# Altium PCB USB_BITES.PcbDoc (part 1 of 2)
Units mm, origin at the board's own origin, x right, y up, seen from the top; angles counter-clockwise.
Board outline 51.5 x 42 mm, 4 copper layers (Top Layer, Layer 1, Layer 2, Bottom Layer), stack 0.603 mm thick; 64 components, 43 nets, 223 pads, 119 vias.
Unrouted connection lines stored in the file: 6.
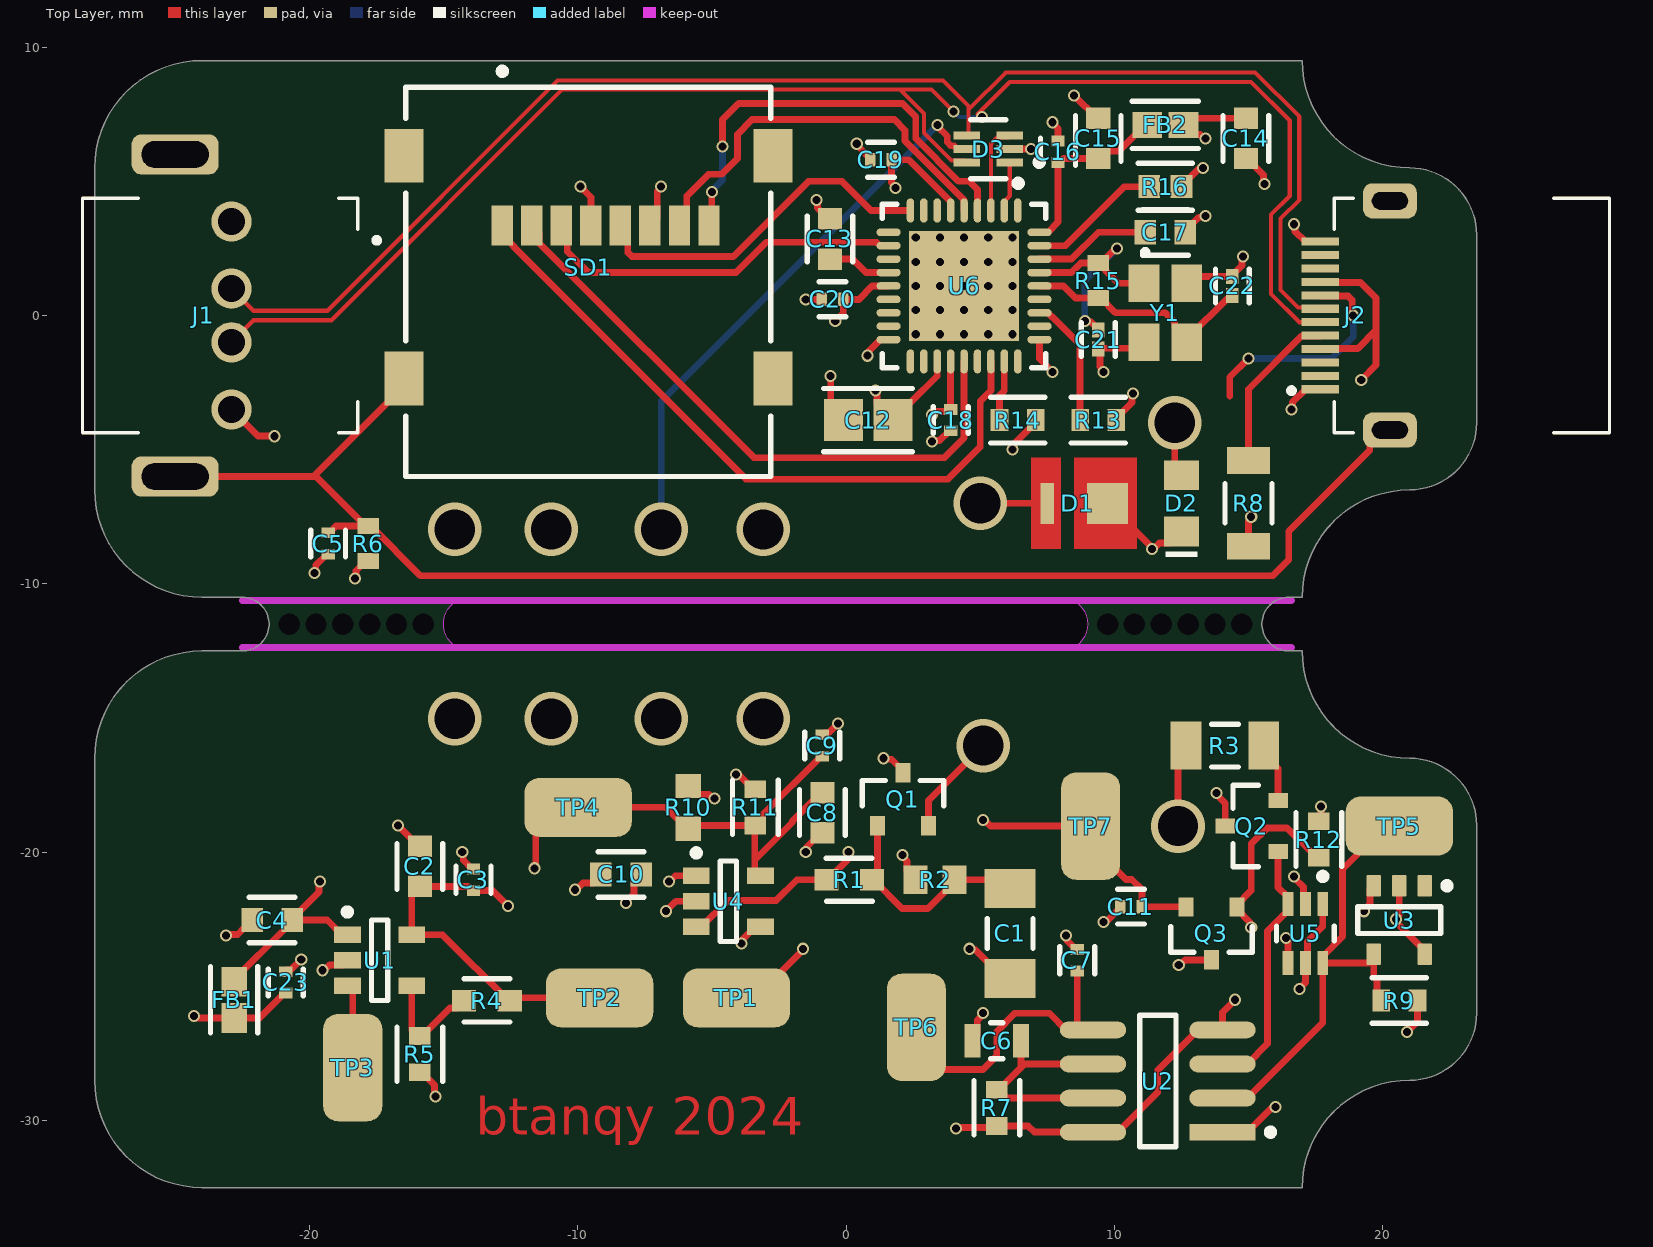
[diagram p0: Top Layer view]
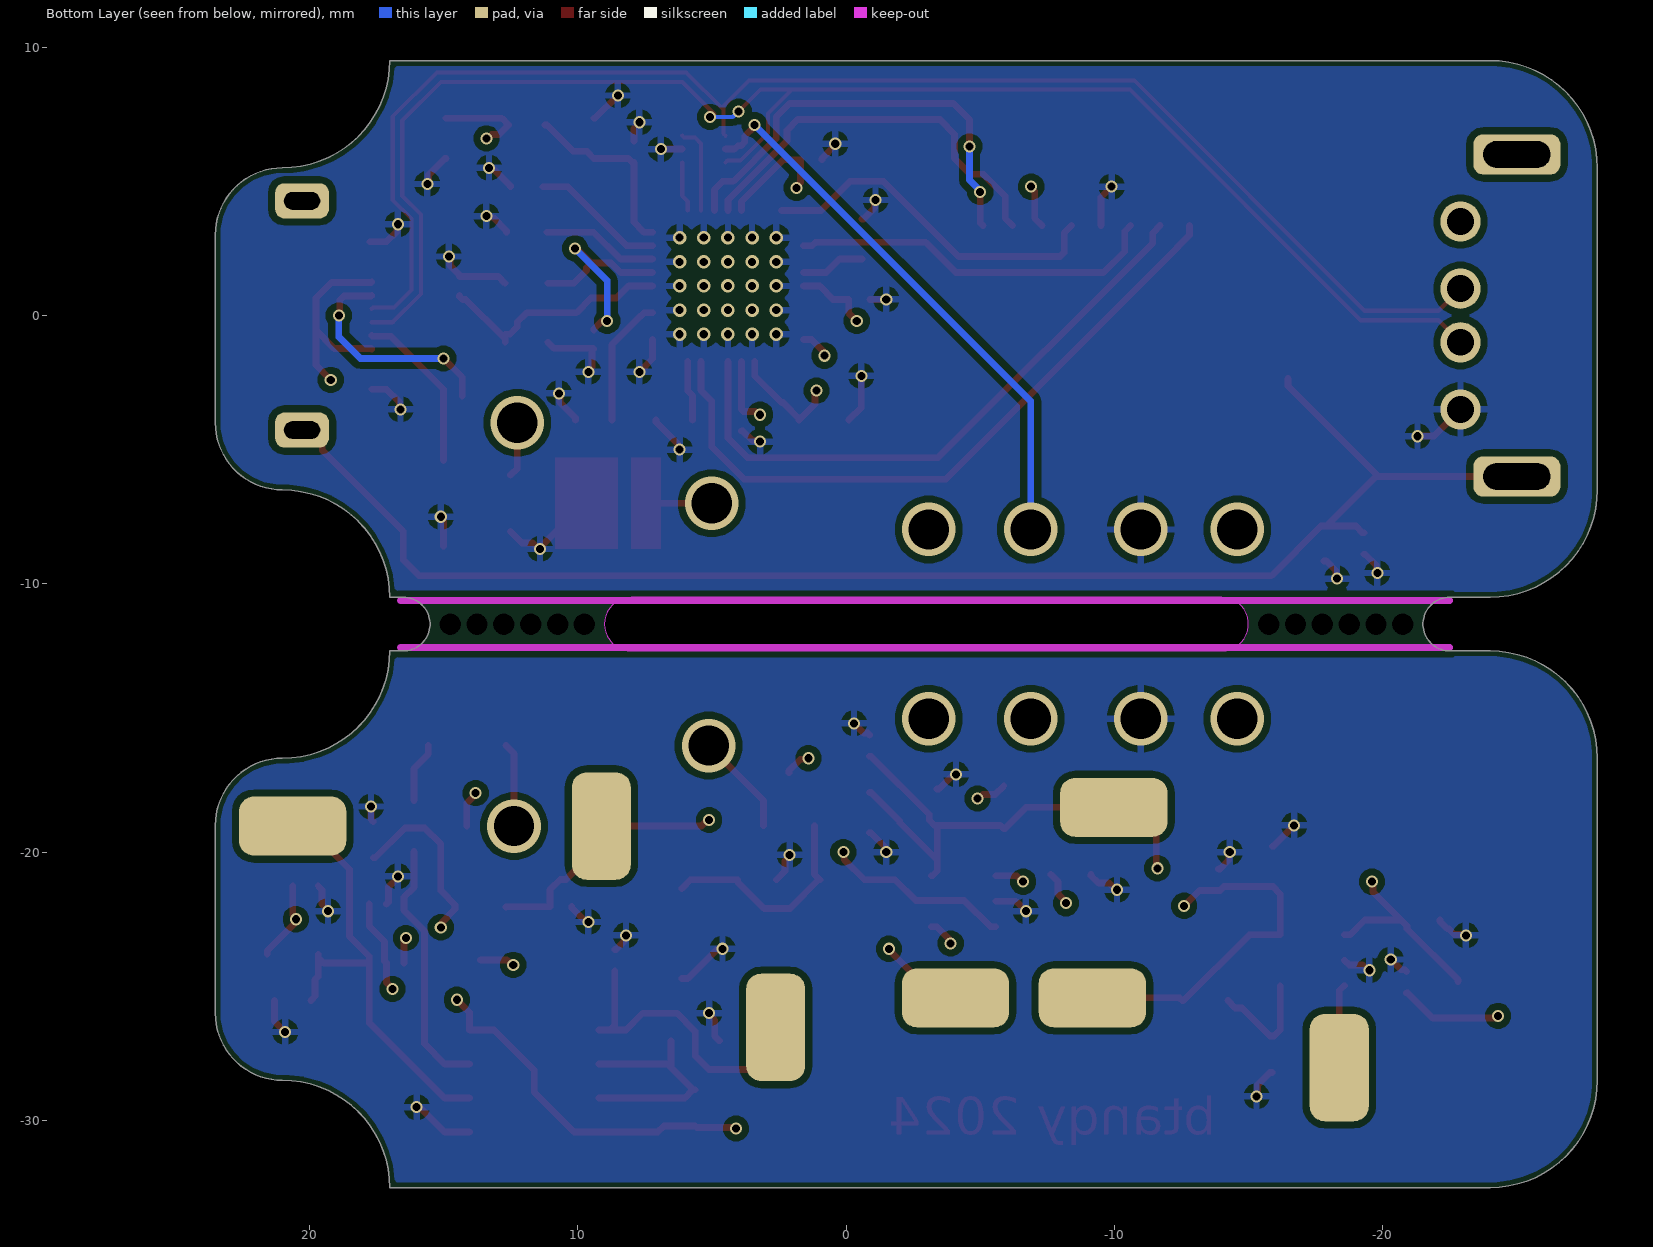
[diagram p1: Bottom Layer view, seen from below]
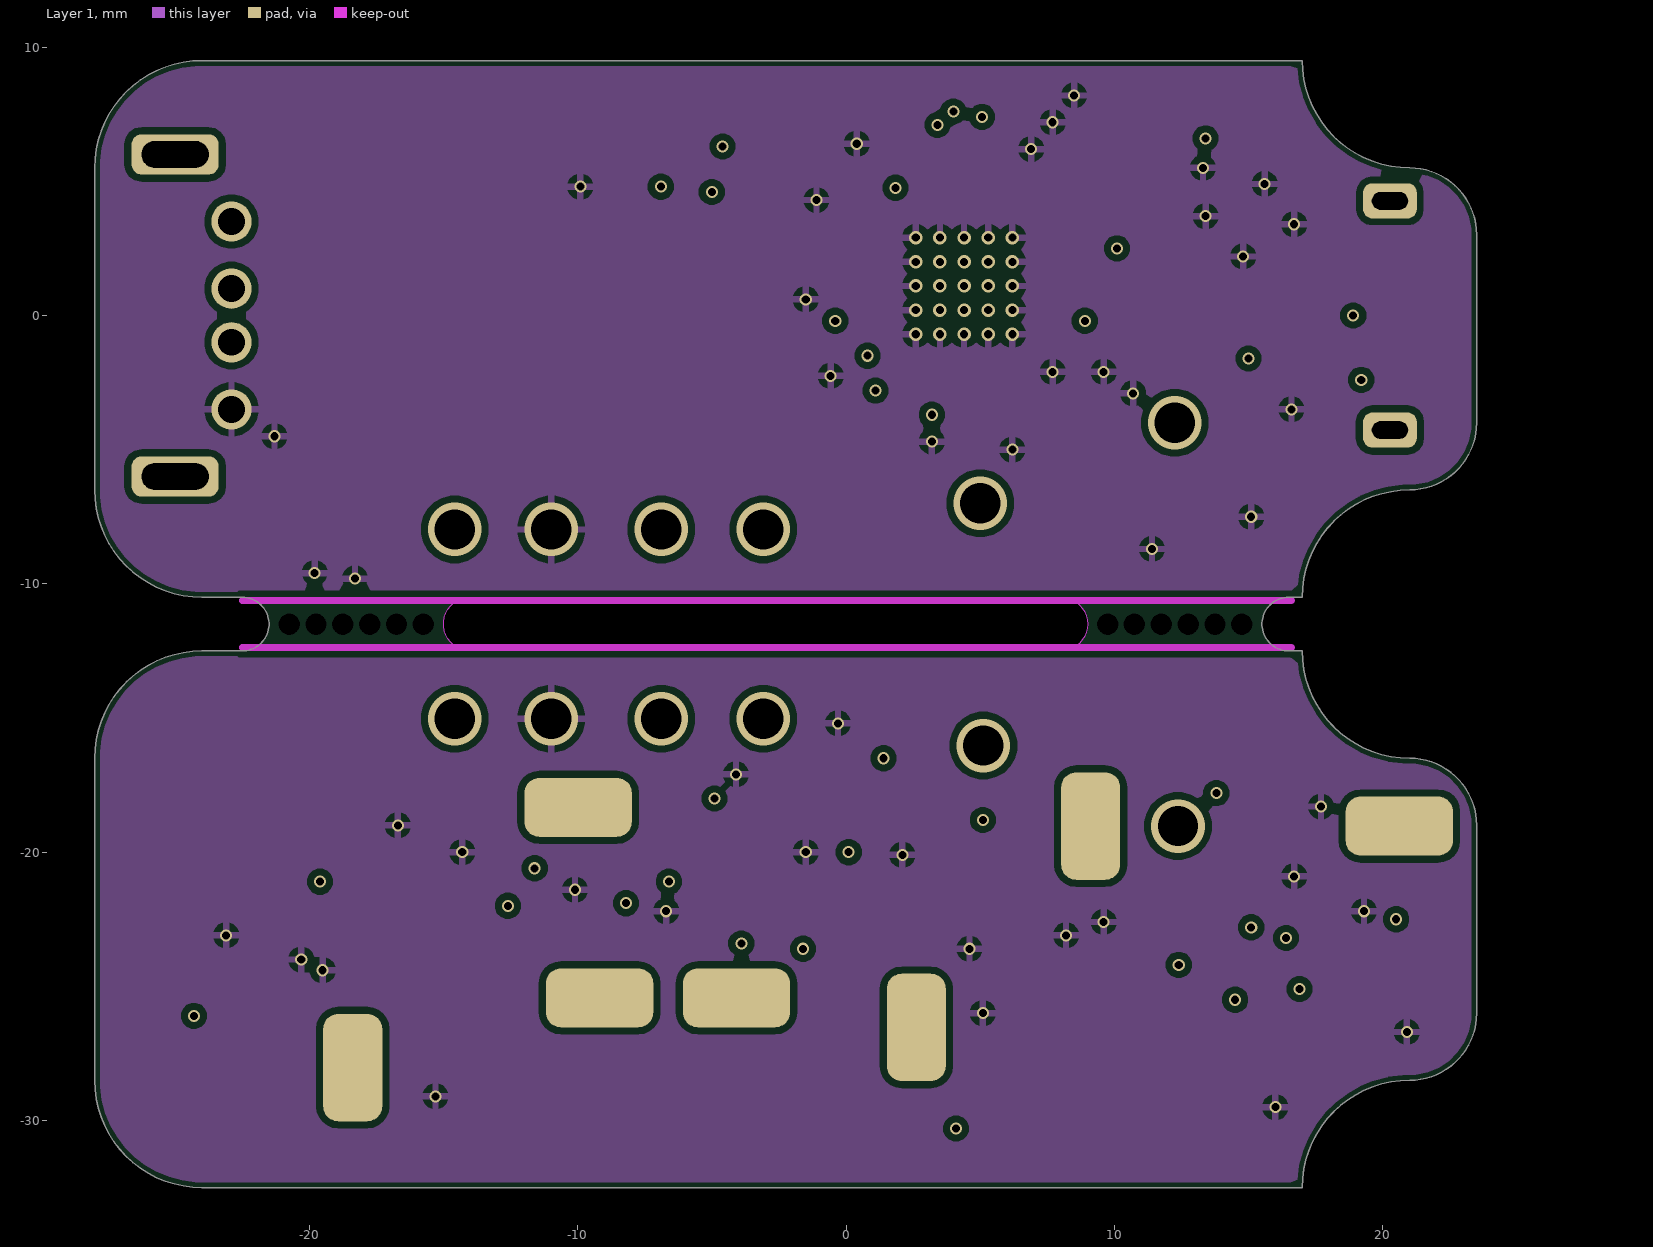
[diagram p2: Layer 1]
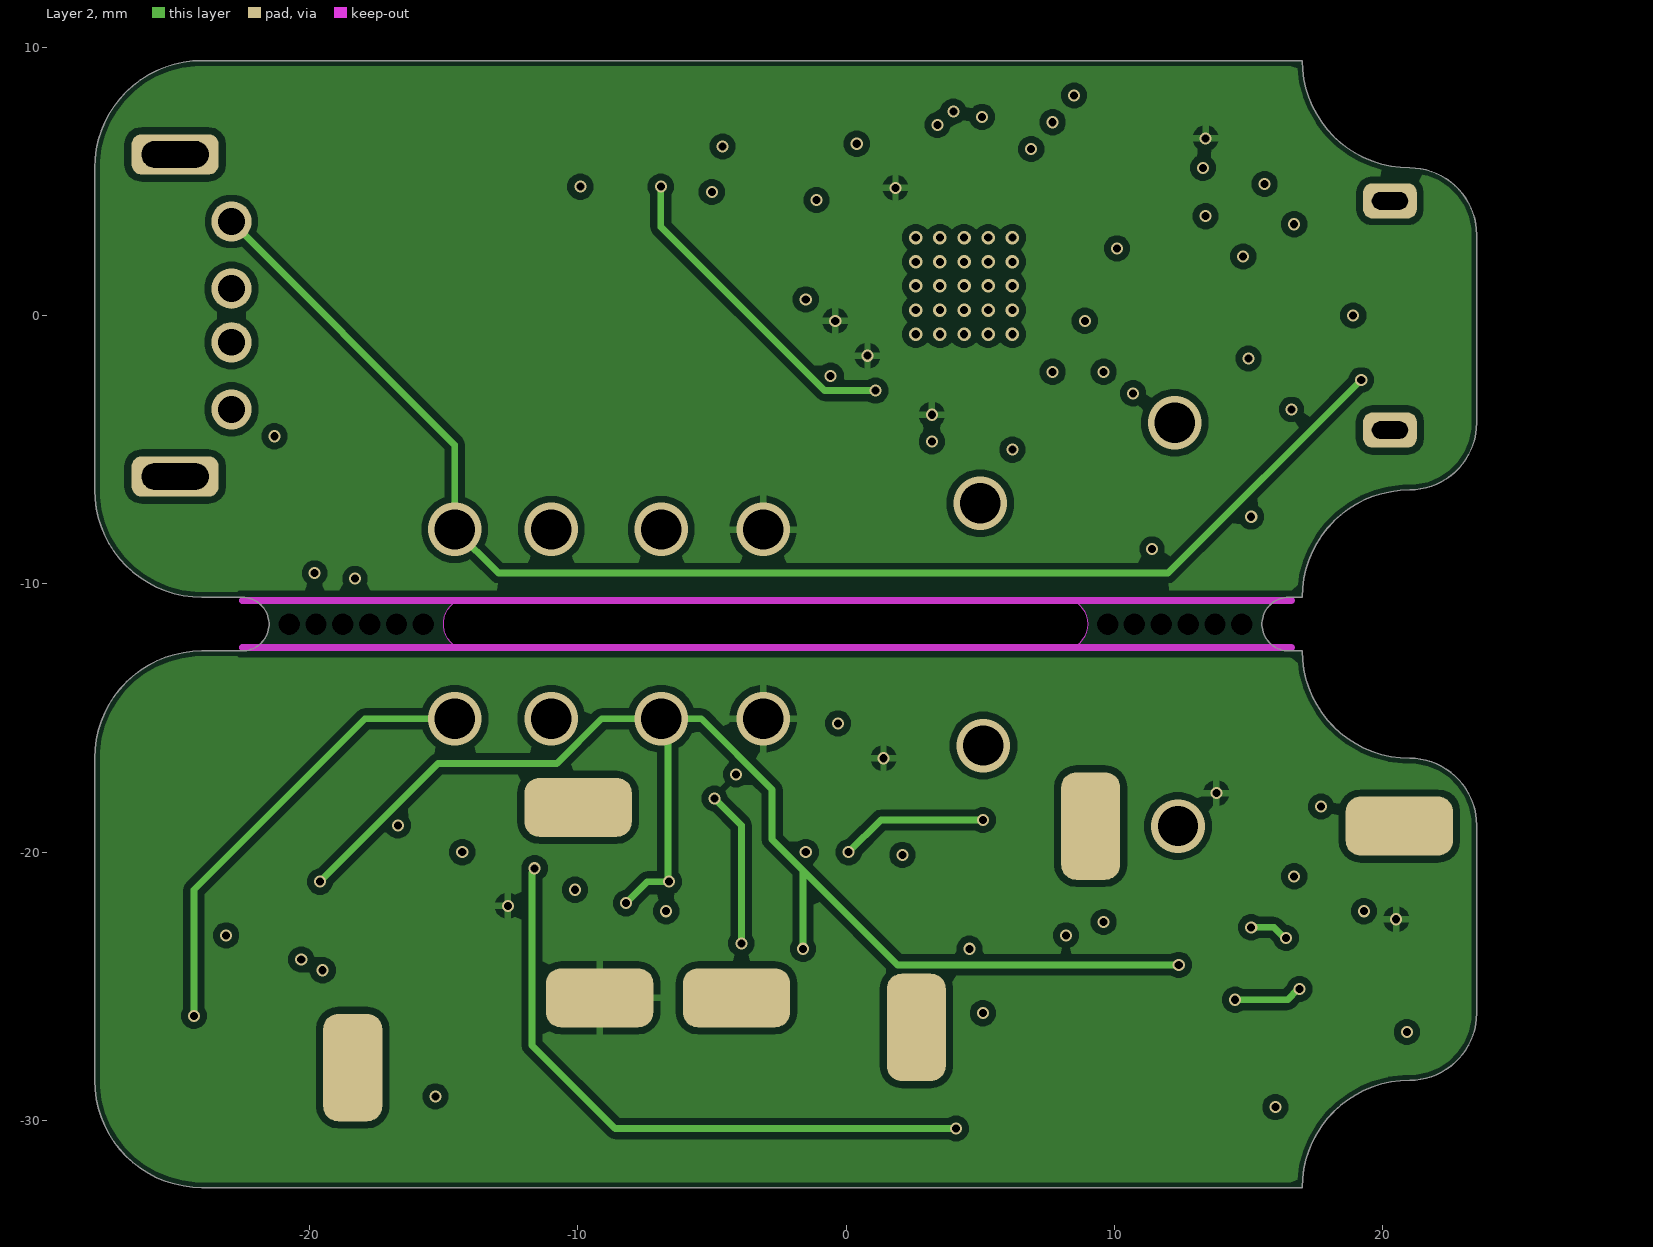
[diagram p3: Layer 2]
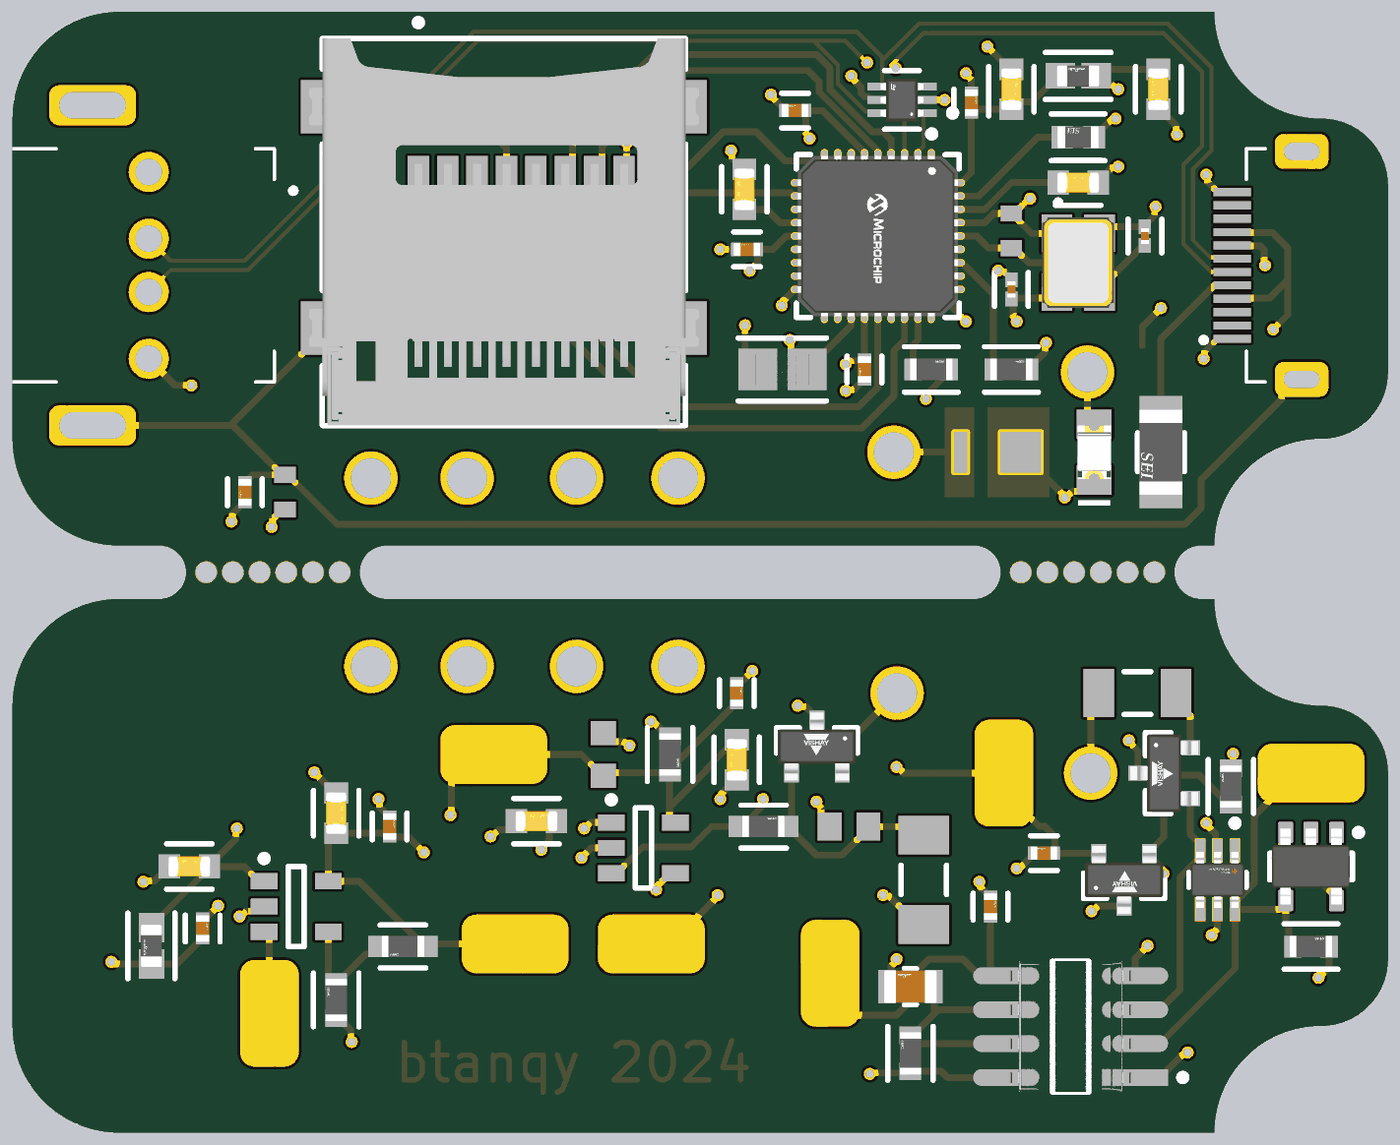
[diagram p4: 3D render of the assembled board from above, using the file's embedded part models]

## Layer stack, top to bottom
Top Solder: solder mask 0.0102, Solder Resist, Dk 3.5
Top Layer: signal copper 0.0356
Dielectric 2: prepreg 0.0711, PP-006, Dk 4.1
Layer 1: signal copper 0.035
Dielectric 1: dielectric 0.32, FR-4, Dk 4.8
Layer 2: signal copper 0.035
Dielectric 3: prepreg 0.0711, PP-006, Dk 4.1
Bottom Layer: signal copper 0.0356
Bottom Solder: solder mask 0.0102, Solder Resist, Dk 3.5

## Board outline
-24,-32.5 cw(c-24,-28.5) -28,-28.5 -28,-16.5 cw(c-24,-16.5) -24,-12.5 -22.5,-12.5 ccw(c-22.5,-11.5) -22.5,-10.5 -24,-10.5 cw(c-24,-6.5) -28,-6.5 -28,5.5 cw(c-24,5.5) -24,9.5 17,9.5 ccw(c21,9.5) 21,5.5 cw(c21,3) 23.5,3 23.5,-4 cw(c21,-4) 21,-6.5 ccw(c21,-10.5) 17,-10.5 16.5,-10.5 ccw(c16.5,-11.5) 16.5,-12.5 17,-12.5 ccw(c21,-12.5) 21,-16.5 cw(c21,-19) 23.5,-19 23.5,-26 cw(c21,-26) 21,-28.5 ccw(c21,-32.5) 17,-32.5
cut-out: -14,-12.5 cw(c-14,-11.5) -14,-10.5 8,-10.5 cw(c8,-11.5) 9,-11.5 cw(c8,-11.5) 8,-12.5

## Design rules (kind name [scope] priority, off if disabled: settings)
BoardOutlineClearance [All] p1: gap=0.254 ignorepadtopadclearanceinfootprint=FALSE except(0: Arc-SplitContinuation Track-SplitContinuation SMDPad-SplitContinuation THPad-SplitContinuation Via-SplitContinuation Fill-SplitContinuation Poly-SplitContinuation Region-SplitContinuation Text-SplitContinuation; 0.2: Arc-OutlineEdge Track-OutlineEdge SMDPad-OutlineEdge THPad-OutlineEdge Via-OutlineEdge Fill-OutlineEdge Poly-OutlineEdge Region-OutlineEdge Text-OutlineEdge)
Clearance [All] p1: gap=0.254 ignorepadtopadclearanceinfootprint=FALSE except(0: SMDPad-Via; 0.1: Arc-Arc Arc-Track Arc-SMDPad Arc-THPad Track-Track Track-SMDPad Track-THPad; 0.15: SMDPad-SMDPad; 0.2: Arc-Via Track-Via THPad-THPad Via-Via)
ComponentClearance [All] p1: gap=0.1 collisioncheckmode=3 verticalgap=0.254 showdistances=FALSE
DiffPairsRouting [All] p1: maxlimit=0.254 minlimit=0.18 mostfreqgap=0.254 toplayer_maxgap=0.22 toplayer_prefgap=0.2 toplayer_minwidth=0.1 toplayer_maxwidth=0.2 toplayer_prefwidth=0.155 midlayer1_mingap=0.254 midlayer1_minwidth=0.381 midlayer1_maxwidth=0.381 midlayer1_prefwidth=0.381 midlayer2_mingap=0.254 midlayer2_minwidth=0.381 midlayer2_maxwidth=0.381 midlayer2_prefwidth=0.381 bottomlayer_mingap=0.254 bottomlayer_minwidth=0.381 bottomlayer_maxwidth=0.381 bottomlayer_prefwidth=0.381 maxuncoupledlength=12.7
MinimumSolderMaskSliver [All] p1: minsoldermaskwidth=0.1
PolygonConnect [All] p1: connectstyle=Relief reliefconductorwidth=0.254 reliefentries=4 polygonreliefangle="90 Angle" airgapwidth=0.254
RoutingVias [All] p1: holewidth=0.3 width=0.45 viastyle="Through Hole" minholewidth=0.3 minwidth=0.45 maxholewidth=10 maxwidth=10
SilkToSilkClearance [All] p1: silktosilkclearance=0.15
SolderMaskExpansion [All] p1: expansion=0.102 istentingtop=FALSE
SupplyNets "Schematic Supply Nets_4" [InNet('AVCC')] p1: voltage=0.000
SupplyNets "Schematic Supply Nets_3" [InNet('4.5V')] p2: voltage=0.000
SupplyNets "Schematic Supply Nets_2" [InNet('3V3')] p3: voltage=0.000
SupplyNets "Schematic Supply Nets_1" [InNet('VCC')] p4: voltage=0.000
SupplyNets "Schematic Supply Nets" [InNet('GND')] p5: voltage=0.000
Width [All] p1: maxlimit=10 minlimit=0.1 preferedwidth=0.254 midlayer1_minwidth=0.254 midlayer1_maxwidth=0.254 midlayer2_minwidth=0.254 midlayer2_maxwidth=0.254 minimp=50.000000 maximp=50.000000 favimp=50.000000
26 further rules are at their usual default settings.

## Classes and differential pairs
component class U_MSC: C13 C14 C15 C16 C17 C18 C19 C20 C21 C22 FB2 R15 R16 U6 Y1
component class Master: C2 C3 C4 C5 C6 C7 C8 C9 C10 C11 C12 C23 D3 FB1 J1 J2 Q3 R4 R5 R6 R7 R8 R9 R10 R11 R12 R13 R14 SD1 TP1 TP2 TP3 TP4 TP5 TP6 TP7 U1 U2 U3 U4 U5
component class Designator: C1 D1 D2 Q1 Q2 R1 R2 R3
differential pair D_IN: +D_IN_P -D_IN_N
differential pair D: +D_P -D_N

## Components (designator, comment, footprint, x,y, rotation, side; value= is the part's Value field where it differs from the comment)
C1 "GRM31CR60J107KEA8L" CAPC3216X19N 6.119,-23.028 r90 top value=100uF
C2 "CC0603KRX7R7BB105" FP-CC0603-DA-MFG -15.881,-20.528 r90 top value="1 uF"
C3 "GRM155R71C104KA88J" FP-GRM155-0_05-MFG -13.881,-21.028 r90 top
C4 "CC0603KRX7R7BB105" FP-CC0603-DA-MFG -21.381,-22.528 r180 top value="1 uF"
C5 "GRM155R71C104KA88J" FP-GRM155-0_05-MFG -19.3,-8.5 r270 top
C6 "GRM21BR61C106KE15K" FP-GRM21B-0_1-MFG 5.619,-27.028 r180 top
C7 "GRM155R71C104KA88J" FP-GRM155-0_05-MFG 8.619,-24.028 r90 top
C8 "CC0603KRX7R7BB105" FP-CC0603-DA-MFG -0.881,-18.528 r270 top value="1 uF"
C9 "GRM155R71C104KA88J" FP-GRM155-0_05-MFG -0.881,-16.028 r90 top
C10 "CC0603KRX7R7BB105" FP-CC0603-DA-MFG -8.381,-20.828 r180 top value="1 uF"
C11 "GRM155R71C104KA88J" FP-GRM155-0_05-MFG 10.619,-22.028 r180 top
C12 "CL21A475KAQNNNE" FP-CL21-IPC_A 0.826,-3.9 r180 top
C13 "CC0603KRX7R7BB105" FP-CC0603-DA-MFG -0.6,2.85 r270 top value="1 uF"
C14 "CC0603KRX7R7BB105" FP-CC0603-DA-MFG 14.9,6.6 r270 top value="1 uF"
C15 "CC0603KRX7R7BB105" FP-CC0603-DA-MFG 9.4,6.6 r90 top value="1 uF"
C16 "GRM155R71C104KA88J" FP-GRM155-0_05-MFG 7.9,6.1 r90 top
C17 "CC0603KRX7R7BB105" FP-CC0603-DA-MFG 11.9,3.1 r180 top value="1 uF"
C18 "GRM155R71C104KA88J" FP-GRM155-0_05-MFG 3.9,-3.9 r270 top
C19 "GRM155R71C104KA88J" FP-GRM155-0_05-MFG 1.3,5.8 r180 top
C20 "GRM155R71C104KA88J" FP-GRM155-0_05-MFG -0.5,0.6 r180 top
C21 "GJM0335C1E200FB01D" FP-GJM033-0_03-IPC_A 9.4,-0.9 r270 top value=20pF
C22 "GJM0335C1E200FB01D" FP-GJM033-0_03-IPC_A 14.4,1.1 r90 top value=20pF
C23 "GRM155R71C104KA88J" FP-GRM155-0_05-MFG -20.881,-24.852 r90 top
D1 "HL-AM-2835H489W-S1-08HL-HR3" HL-AM-2835H489W-S1-08HL-HR3-Footprint-1 8.5,-7 r0 top
D2 "150080RS75000" WL-SMCW_0805_150080xx75000 12.5,-7 r90 top
D3 "USBLC6-2P6" FP-SOT-666-MFG 5.3,6.2 r180 top
FB1 "BLM18PG600SN1D" FP-BLM18-0_15-t0_8-IPC_B -22.8,-25.5 r270 top
FB2 "BLM18PG600SN1D" FP-BLM18-0_15-t0_8-IPC_B 11.9,7.1 r180 top
J1 "USB-AP-S-RA" BELFUSE_SS-52400-002#1 -25,0 r270 top
J2 "GT-USB-8016B" BELFUSE_SS-52400-002#2 25,0 r90 top
Q1 "SI2342DS-T1-GE3" FP-S-03946-MFG 2.119,-18.028 r90 top
Q2 "SI2342DS-T1-GE3" FP-S-03946-MFG 15.119,-19.028 r180 top
Q3 "SI2342DS-T1-GE3" FP-S-03946-MFG 13.619,-23.028 r270 top
R1 "RT0603BRD0732KL" FP-RT0603-0_55-MFG 0.119,-21.028 r0 top
R2 "2k" RESC1608X55X30ML15T15 3.319,-21.028 r0 top
R3 "62R 1% 1206(3216)" RESC1206(3216)_N 14.119,-16.028 r180 top value=62.00
R4 "RT0603BRD0732KL" FP-RT0603-0_55-MFG -13.381,-25.528 r180 top
R5 "RC0603FR-0710KL" FP-RC0603-0_55-IPC_C -15.881,-27.528 r90 top
R6 "RC0603JR-07330RL" RESC1608X55X25LL10T15 -17.8,-8.5 r90 top
R7 "RC0603FR-0710KL" FP-RC0603-0_55-IPC_C 5.619,-29.528 r90 top
R8 "RMCF1206JT56K0" FP-RMCF1206-MFG 15,-7 r270 top
R9 "RC0603FR-0710KL" FP-RC0603-0_55-IPC_C 20.619,-25.528 r0 top
R10 "RC0603FR-0744K2L" CAPC1608X06N -5.881,-18.328 r270 top value=44.2k
R11 "RC0603FR-0710KL" FP-RC0603-0_55-IPC_C -3.381,-18.328 r270 top
R12 "RC0603FR-0710KL" FP-RC0603-0_55-IPC_C 17.619,-19.528 r90 top
R13 "RC0603FR-0710KL" FP-RC0603-0_55-IPC_C 9.4,-3.9 r0 top
R14 "RC0603FR-0710KL" FP-RC0603-0_55-IPC_C 6.4,-3.9 r0 top
R15 "1M" RESC1608X55X25LL10T15 9.4,1.3 r270 top
R16 "RMCF0603FT12K0" FP-RMCF0603-IPC_C 11.9,4.8 r180 top
SD1 "47219-2001" MOLX-47219-2001-8_V -9.6,1.8 r0 top
TP1 "RH-5019" RH-5019-Footprint-1 -4.081,-25.428 r180 top
TP2 "RH-5019" RH-5019-Footprint-1 -9.181,-25.428 r180 top
TP3 "RH-5019" RH-5019-Footprint-1 -18.381,-28.028 r90 top
TP4 "RH-5019" RH-5019-Footprint-1 -9.981,-18.328 r180 top
TP5 "RH-5019" RH-5019-Footprint-1 20.619,-19.028 r180 top
TP6 "RH-5019" RH-5019-Footprint-1 2.619,-26.528 r90 top
TP7 "RH-5019" RH-5019-Footprint-1 9.119,-19.028 r90 top
U1 "RS3236-ADJ8YF5" SOT95P245X110-5N -17.381,-24.028 r0 top
U2 "NE555DR" FP-D0008A-IPC_A 11.619,-28.528 r180 top
U3 "SN74AHC1G14DBVR" DBV0005A_L 20.619,-22.528 r270 top
U4 "RS3236-ADJ8YF5" SOT95P245X110-5N -4.381,-21.828 r0 top
U5 "SN74LVC1G97DCKR" FP-DCK0006A-MFG 17.119,-23.028 r270 top
U6 "USB2240-AEZG-06" FP-36QFN-4106-6x6B-MFG 4.4,1.1 r270 top value=100nF
Y1 "830035266" WE-XTAL_CFPX-180 11.9,0.1 r270 top

## Footprints (in the part's own frame and the unit in brackets; to place one, negate y for a bottom-side part, rotate by r counter-clockwise, add the part's x,y. Pads: shape width x height; smd on the part's side, far side on the other; paste and mask are expansions set on the pad)
BELFUSE_SS-52400-002#1 [mm]
  round 1.5 hole 1: 1(-3.5,2.1) 2(1,2.1) 3(-1,2.1) 4(3.5,2.1)
  rrect50% 1.5x3.25 hole 1 slot 2.5 at 90 deg: 5(-6,0) 6(6,0)
  silkscreen extent -4.37,-3.45 4.37,7.61
BELFUSE_SS-52400-002#2 [mm]
  rect 0.3x1.4 smd: A1(-2.75,7.33) A2(-2.25,7.33) A3(-1.75,7.33) A4(-1.25,7.33) A5(-0.75,7.33) A6(-0.25,7.33) A7(0.25,7.33) A8(0.75,7.33) A9(1.25,7.33) A10(1.75,7.33) A11(2.25,7.33) A12(2.75,7.33)
  rrect50% 1.3x2 hole 0.65 slot 1.35 at 90 deg: S1(-4.27,4.73) S2(4.27,4.73)
  silkscreen extent -4.37,-3.45 4.37,8.5
CAPC1608X06N [mm] "Chip Capacitor, 2-Leads, Body 1.60x0.80mm, IPC Medium Density"
  rect 0.9x0.95 smd: 1(-0.8,0) 2(0.8,0)
  body extent -0.85,-0.45 0.85,0.45, height 0.55
CAPC3216X19N [mm] "Chip Capacitor, 2-Leads, Body 3.20x1.60mm, IPC Medium Density"
  rect 1.45x1.9 smd: 1(-1.675,0) 2(1.675,0)
  silkscreen extent -0.55,-0.85 0.55,0.85, body extent -1.45,-0.95 1.45,0.95, height 1.9
DBV0005A_L [mm] "SOT23, 5-Leads, Body 3.05x1.75mm, Pitch 0.95mm, IPC High Density"
  rrect18% 0.8x0.55 smd: 1(-1.275,0.95) 2(-1.275,0) 3(-1.275,-0.95) 4(1.275,-0.95) 5(1.275,0.95)
  silkscreen extent -1.4,-1.55 0.5,1.9, body extent -1.42,-1.46 1.42,1.46, height 1.08
FP-36QFN-4106-6x6B-MFG [mm]
  rrect100% 0.9x0.28 smd paste-1000 mask+0: 1(-2.812,2) 2(-2.812,1.5) 3(-2.812,1) 4(-2.812,0.5) 5(-2.812,0) 6(-2.812,-0.5) 7(-2.812,-1) 8(-2.812,-1.5) 9(-2.812,-2) 19(2.812,-2) 20(2.812,-1.5) 21(2.812,-1) 22(2.812,-0.5) 23(2.812,0) 24(2.812,0.5) 25(2.812,1) 26(2.812,1.5) 27(2.812,2)
  rrect100% 0.28x0.9 smd paste-1000 mask+0: 10(-2,-2.812) 11(-1.5,-2.812) 12(-1,-2.812) 13(-0.5,-2.812) 14(0,-2.812) 15(0.5,-2.812) 16(1,-2.812) 17(1.5,-2.812) 18(2,-2.812) 28(2,2.812) 29(1.5,2.812) 30(1,2.812) 31(0.5,2.812) 32(0,2.812) 33(-0.5,2.812) 34(-1,2.812) 35(-1.5,2.812) 36(-2,2.812)
  rect 4.1x4.1 smd paste-1000 mask+0: 37(0,0)
  silkscreen extent -3.95,-3.05 3.05,3.05, body extent -3.36,-3.36 3.36,3.36, height 0.25
FP-BLM18-0_15-t0_8-IPC_B [mm]
  rect 1.106x0.958 smd paste+0 mask+0: 1(-0.676,0) 2(0.676,0)
  silkscreen extent -1.23,-0.88 1.23,0.88, body extent -0.8,-0.4 0.8,0.4, height 0.95
FP-CC0603-DA-MFG [mm]
  rect 0.8x0.9 smd paste+0 mask+0: 1(-0.75,0) 2(0.75,0)
  silkscreen extent -0.85,-0.85 0.85,0.85, body extent -0.8,-0.4 0.8,0.4, height 0.9
FP-CL21-IPC_A [mm]
  rect 1.455x1.556 smd paste+0 mask+0: 1(-0.926,0) 2(0.926,0)
  silkscreen extent -1.65,-1.18 1.65,1.18, body extent -2.15,-1.28 2.15,1.28, height 0.25
FP-D0008A-IPC_A [mm]
  rect 2.469x0.622 smd paste+0 mask+0: 1(-2.414,1.905)
  rrect100% 2.469x0.622 smd paste+0 mask+0: 2(-2.414,0.635) 3(-2.414,-0.635) 4(-2.414,-1.905) 5(2.414,-1.905) 6(2.414,-0.635) 7(2.414,0.635) 8(2.414,1.905)
  silkscreen extent -4.32,-2.45 0.68,2.45, body extent -3,-2.45 3,2.45, height 1.75
FP-DCK0006A-MFG [mm]
  rect 0.9x0.4 smd paste-1000 mask+0: 1(-1.1,0.65) 2(-1.1,0) 3(-1.1,-0.65) 4(1.1,-0.65) 5(1.1,0) 6(1.1,0.65)
  silkscreen extent -2.25,-1.07 0.28,1.07, body extent -1.05,-1 1.05,1, height 1.1
FP-GJM033-0_03-IPC_A [mm]
  rect 0.554x0.463 smd paste+0 mask+0: 1(-0.354,0) 2(0.354,0)
  silkscreen extent -0.63,-0.63 0.63,0.63, body extent -0.83,-0.43 0.83,0.43, height 0.25
FP-GRM21B-0_1-MFG [mm]
  rect 0.6x1.25 smd paste+0 mask+0: 1(-0.9,0) 2(0.9,0)
  silkscreen extent -0.23,-0.67 0.23,0.67, body extent -1,-0.63 1,0.63, height 1.35
FP-GRM155-0_05-MFG [mm]
  rect 0.4x0.5 smd paste+0 mask+0: 1(-0.4,0) 2(0.4,0)
  silkscreen extent -0.5,-0.65 0.5,0.65, body extent -0.5,-0.25 0.5,0.25, height 0.55
FP-RC0603-0_55-IPC_C [mm]
  rect 0.659x0.812 smd paste+0 mask+0: 1(-0.677,0) 2(0.677,0)
  silkscreen extent -1.01,-0.85 1.01,0.85, body extent -0.8,-0.4 0.8,0.4, height 0.55
FP-RMCF0603-IPC_C [mm]
  rect 0.806x0.858 smd paste+0 mask+0: 1(-0.601,0) 2(0.601,0)
  silkscreen extent -1,-0.87 1,0.87, body extent -1.1,-0.58 1.1,0.58, height 0.25
FP-RMCF1206-MFG [mm]
  rect 1x1.6 smd paste+0 mask+0: 1(-1.6,0) 2(1.6,0)
  silkscreen extent -0.72,-0.87 0.72,0.87, body extent -1.6,-0.8 1.6,0.8, height 0.7
FP-RT0603-0_55-MFG [mm]
  rect 0.9x0.8 smd paste+0 mask+0: 1(-0.85,0) 2(0.85,0)
  silkscreen extent -0.85,-0.81 0.86,0.8, body extent -0.8,-0.4 0.8,0.4, height 0.55
FP-S-03946-MFG [mm]
  rect 0.724x0.559 smd paste+0 mask+0: 1(-0.984,0.95) 2(-0.984,-0.95) 3(0.984,0)
  silkscreen extent -0.25,-1.52 0.7,1.52, body extent -1.27,-1.46 1.27,1.46, height 1.12
FP-SOT-666-MFG [mm]
  rect 0.99x0.3 smd paste+0 mask+0: 1(-0.805,0.5) 2(-0.805,0) 3(-0.805,-0.5) 4(0.805,-0.5) 5(0.805,0) 6(0.805,0.5)
  silkscreen extent -2.02,-1.1 0.65,1.1, body extent -1.4,-0.95 1.4,0.95, height 0.25
HL-AM-2835H489W-S1-08HL-HR3-Footprint-1 [mm]
  rect 1.524x1.524 smd: 1(1.25,0)
  rect 0.5x1.524 smd: 2(-1,0)
  Top Layer region: -1.6,1.69 -1.6,-1.69 -0.5,-1.69 -0.5,1.69
  Top Layer region: 0,1.69 0,-1.69 2.33,-1.69 2.33,1.69
MOLX-47219-2001-8_V [mm] "CONN, 8-Leads, Body 14.5x13.6mm, Pitch 1.1mm"
  rect 0.8x1.5 smd: 1(-3.205,1.55) 2(-2.105,1.55) 3(-1.005,1.55) 4(0.095,1.55) 5(1.195,1.55) 6(2.295,1.55) 7(3.395,1.55) 8(4.495,1.55)
  rect 1.45x2 smd: 9(6.875,4.15) 10(6.875,-4.15) 11(-6.875,-4.15) 12(-6.875,4.15)
  silkscreen extent -6.8,-7.8 6.8,7.42, body extent -7.3,-7.79 7.3,6.71, height 1.91
RESC1206(3216)_N [mm] "Chip Resistor, Body 3.2x1.6mm, IPC Medium Density"
  rect 1.15x1.8 smd: 1(-1.45,0) 2(1.45,0)
  silkscreen extent -0.5,-0.8 0.5,0.8, body extent -1.67,-0.87 1.67,0.87, height 0.75
RESC1608X55X25LL10T15 [mm] "Chip Resistor, 2-Leads, Body 1.60x0.80mm, IPC High Density"
  rect 0.6x0.8 smd: 1(-0.65,0) 2(0.65,0)
  body extent -0.85,-0.45 0.85,0.45, height 0.55
RESC1608X55X30ML15T15 [mm] "Chip Resistor, 2-Leads, Body 1.60x0.80mm, IPC Low Density"
  rect 0.9x1.05 smd: 1(-0.725,0) 2(0.725,0)
  body extent -0.87,-0.48 0.87,0.48, height 0.55
RH-5019-Footprint-1 [mm]
  rrect50% 4x2.2 all layers, no hole: 1(0,0)
SOT95P245X110-5N [mm] "SOT23, 5-Leads, Body 2.90x2.45mm, Pitch 0.95mm, IPC Medium Density"
  rect 1x0.6 smd: 1(-1.2,0.95) 2(-1.2,0) 3(-1.2,-0.95) 4(1.2,-0.95) 5(1.2,0.95)
  silkscreen extent -1.32,-1.5 0.3,1.92, body extent -0.7,-1.5 0.7,1.5, height 1.1
WE-XTAL_CFPX-180 [mm] "Quartz Crystal, size CFPX-180, body 3.4x2.7mm"
  rect 1.4x1.15 smd: 1(-1.1,-0.8) 2(1.1,-0.8) 3(1.1,0.8) 4(-1.1,0.8)
  silkscreen extent -2.35,-0.85 -2.15,-0.65, body extent -1.7,-1.35 1.7,1.35, height 0.65
WL-SMCW_0805_150080xx75000 [mm] "SMD Mono-color Chip LED, body 2.0x1.25mm"
  rect 1.1x1.3 smd: 1(-1.05,0) 2(1.05,0)
  silkscreen extent -2,-0.6 -1.8,0.6, body extent -1,-0.63 1,0.62, height 0.7

## Part data
C1: library part CMP-001-00083-1, "6.3V 100uF X5R ¡À10% 1206 Multilayer Ceramic Capacitors MLCC - SMD/SMT ROHS"
C2 C4 C8 C10 C13 C14 C15 C17: library part CMP-03422-000924-1, "CAP CER 1UF 16V X7R 0603", Capacitance="1 uF", Manufacturer=YAGEO, Package=CC0603-DA, Temperature="-55°C to +125°C", Temperature Characteristic=X7R, Temperature Coefficient=15%, Temperature Range High=+125°C, Temperature Range Low=-55°C, Tolerance=0.1, Voltage="16 V", Automotive=No, Category=Cap, ComponentLink2Description=Datasheet, ComponentLink2URL=http://www.yageo.com/documents/recent/UPY-GPHC_X7R_6.3V-to-50V_18.pdf, Device Class L1="Passive Components", Device Class L2=Capacitors, Device Class L3="Ceramic Capacitors", Digikey Description="CAP CER 1UF 16V X7R 0603", Footprint Url=http://www.yageo.com/exep/pages/download/literatures/UPY-C_GEN_24.pdf, Height=0.9mm, Lead Free=Yes, Manufacturer Part Number=CC0603KRX7R7BB105, Material=Ceramic, Mouser Description="Multilayer Ceramic Capacitor, CC Series, 1 - F, - 10%, X7R, 16 V, 0603 [1608 Metric]", Octopart=https://octopart.com/cc0603krx7r7bb105-yageo-42271928, RoHS=TRUE, Voltage Rating="16 V"
C3 C5 C7 C9 C11 C16 C18 C19 C20 C23: library part CMP-2008-03928-2, Capacitance=100nF, Case Code (Imperial)=0402, Case Code (Metric)=1005, Dielectric=X7R, Manufacturer Lifecycle Status=NRND, Max Operating Temperature=125°C, Min Operating Temperature=-55°C, Tolerance=10%, Voltage=16V, Case/Package=0402, Depth=500µm, Height=550µm, Lead Free="Lead Free", Length=1mm, Material=Ceramic, Mount="Surface Mount", NexarPartId=9223238, Number of Pins=2, Packaging="Cut Tape", Radiation Hardening=No, REACH SVHC="No SVHC", RoHS=Compliant, Schedule B="8532240020, 8532240020", Termination=SMD/SMT, Thickness=500µm, Voltage Rating=16V, Voltage Rating (DC)=16V, Width=500µm
C6: library part CMP-2007-03534-2, "Chip Multilayer Ceramic Capacitors for General Purpose, 0805, 10uF, X5R, 15%, 10%, 16V", Capacitance=10uF, Case Code (Imperial)=0805, Case Code (Metric)=2012, Dielectric=X5R, Max Operating Temperature=85°C, Min Operating Temperature=-55°C, Package Quantity=10000, Tolerance=10%, Voltage=16V, Case/Package=0805, Depth=1.25mm, Height=1.25mm, Length=2mm, Mount="Surface Mount", Packaging="Tape and Reel", Radiation Hardening=No, REACH SVHC="No SVHC", Termination=SMD/SMT, Thickness=0.053inch, Voltage Rating=16V, Voltage Rating (DC)=16V, Width=0.049inch
C12: library part CMP-13271-002624-1, "CL21 Series 0805 4.7uF 25V ±10% Tolerance X5R Multilayer Ceramic Chip Capacitor", Capacitance=4.7uF, Case Code (Imperial)=0805, Case Code (Metric)=2012, Dielectric=X5R, Max Operating Temperature=85°C, Min Operating Temperature=-55°C, Package Quantity=1, Tolerance=10%, Voltage Rating=25V, Case/Package=0805, Depth=1.25mm, Height=1.25mm, Lead Free="Lead Free", Length=2mm, Mount="Surface Mount", Packaging="Tape and Reel", Radiation Hardening=No, Thickness=0.055inch, Voltage Rating (DC)=25V, Width=0.049inch
C21 C22: library part CMP-06035-050874-1, "Ceramic Capacitor 20pF ±1% 25V C0G 0201 (0603 Metric)"
D1: library part CMP-007-00036-1
D2: library part CMP-1426-00011-3, "LED Uni-Color Red 630nm 2-Pin Chip 0805(2012Metric) T/R", Case Code (Imperial)=0805, Case Code (Metric)=2012, Color=Red, Forward Current=100mA, Forward Voltage=2V, Max Junction Temperature (Tj)=95°C, Max Operating Temperature=85°C, Max Reverse Voltage (DC)=5V, Min Operating Temperature=-40°C, Power Dissipation=72mW, Test Current=20mA, Case/Package=0805, Dominant Wavelength=625nm, Height=700µm, Length=2mm, Lens Style="Clear, Rectangular", Luminous Intensity=150mcd, Mount="Surface Mount", Packaging="Tape and Reel", Peak Wavelength=630nm, REACH SVHC=Unknown, RoHS=Compliant, Viewing Angle=140°, Wavelength=625nm, Width=1.25mm
D3: library part CMP-12225-000058-1, "TVS DIODE 5.25V 17V SOT666", Breakdown Voltage=6V, Capacitance=3.5pF, Case/Package=SOT-666, Clamping Voltage=17V, Leakage Current=150nA, Max Operating Temperature=125°C, Min Operating Temperature=-40°C, Operating Supply Voltage=5V, Package Quantity=1, Peak Pulse Current=5A, Power Line Protection=Yes, Test Current=1mA, Contact Plating=Tin, Depth=1.3mm, Direction=Unidirectional, Element Configuration=Dual, ESD Protection=Yes, Height=0.6mm, Lead Free="Lead Free", Length=1.7mm, Max Breakdown Voltage=6V, Max Reverse Leakage Current=150nA, Min Breakdown Voltage=6V, Mount="Surface Mount", Number of Bidirectional Channels=2, Number of Channels=2, Number of Elements=1, Number of Pins=6, Packaging="Tape and Reel", Polarity=Unidirectional, Radiation Hardening=No, REACH SVHC="No SVHC", Reverse Breakdown Voltage=6V, Reverse Standoff Voltage=5V, Termination=SMD/SMT, Width=1.3mm, Working Voltage=5V
FB1 FB2: library part CMP-0686-00575-3, "Chip Ferrite Bead, 0603, 60Ω @ 100MHz, 0.1Ω, , 1A", Case Code (Imperial)=0603, Case Code (Metric)=1608, Current Rating=500mA, DC Resistance (DCR)=100mR, ESR (Equivalent Series Resistance)=60R, Frequency=100MHz, Max Operating Temperature=125°C, Min Operating Temperature=-55°C, Package Quantity=1, Tolerance=25%, Case/Package=0603, Core Material=Ferrite, Depth=0.8mm, Height=0.8mm, Impedance=60R, Lead Free="Lead Free", Length=1.6mm, Material=Steel, Max Current Rating=500mA, Max DC Current=500mA, Number of Circuits=1, Number of Lines=1, Number of Pins=2, Packaging="Tape and Reel", REACH SVHC="No SVHC", Resistance=100mR, RoHS Compliant=Yes, Shielding=Unshielded, Termination=SMD/SMT, Test Frequency=100MHz, Width=0.8mm
J1: library part CMP-002-00072-3, "USB Type A Plug Single R/A PCB"
J2: library part CMP-002-00071-2, "USB C 2.0 Plug"
Q1 Q2 Q3: library part CMP-02550-000018-1, "MOSFET N-CH 8V 6A SOT-23", Continuous Drain Current=6A, Drain To Source Breakdown Voltage=8V, Drain To Source Resistance=0.014Ω, Gate To Source Voltage=5V, Input Capacitace At Vds="1070pF @ 4V", Manufacturer=Vishay, Max Forward Diode Voltage=1.2V, Max Junction Temp=+150°C, Package=S-03946, Power Dissipation=1.3W, Pulse Drain Current=30A, Temperature="-55°C to +150°C", Temperature Range Low=-55°C, Typ Forward Diode Voltage=0.82V, Automotive=No, Category=Trans, ComponentLink2Description=Datasheet, ComponentLink2URL=https://www.vishay.com/docs/63302/si2342ds.pdf, Depletion Mode=False, Device Class L1="Discrete Semiconductors", Device Class L2=Transistors, Device Class L3=MOSFETs, Digikey Description="MOSFET N-CH 8V 6A SOT-23", Drain To Source Voltage=8V, Gate Charge At Vgs="10.5nC @ 4.5V", Height=1.12mm, Ipc Land Pattern Name=SOT95P237X100-3, Lead Free=Yes, Manufacturer Part Number=SI2342DS-T1-GE3, Mouser Description="MOSFET 8V 6A 2.5", Number of Channels=1, Number Of N Channels=1, Octopart=https://octopart.com/si2342ds-t1-ge3-vishay-45050957, Reverse Recovery Charge=17nC, Reverse Recovery Time=40ns, RoHS=TRUE, Rthja Max=75°C/W, Standoff Height=0.01mm, Temperature Range High=+150°C, Threshold Vgs Max=0.8V, Threshold Vgs Min=0.35V, Transconductance=75S, Turn Off Delay Time=65ns, Turn On Delay Time=6ns
R1 R4: library part CMP-00621-34935746-1, "RT0603BRD0732KL High Precision-High Stability Chip Resistor Thin Film 0603 32kOhm 0.1% Paper T/R", Case/Package=0603, Max Operating Temperature=155°C, Max Power Dissipation=100mW, Min Operating Temperature=-55°C, Resistance=32kΩ, Temperature Coefficient=25ppm/°C, Tolerance=0.1%, Composition="Thin Film", Features="Moisture Resistant", Height=558.8µm, Length=1.6002mm, NexarPartId=34935746, Number of Terminations=2, Packaging="Tape & Reel", RoHS=Compliant, Width=787.4µm
R2: library part CMP-2000-00317-1, Manufacturer=Panasonic, Part Number=ERJ-3EKF2001V
R3: library part CMP-1014-00373-1, "62R 0.25W 1% 1206 (3216 Metric)  SMD", Case-EIA=1206, Case-Metric=3216, Power="0.25 W", Tolerance="1 %", Technology=SMT
R5 R7 R9 R11 R12 R13 R14: library part CMP-2100-03664-2, "RES 10K OHM 1% 1/10W 0603", Case Code (Imperial)=0603, Case Code (Metric)=1608, Max Operating Temperature=155°C, Max Power Dissipation=100mW, Min Operating Temperature=-55°C, Resistance=10k, Resistance Tolerance=1%, Resistor Type="Thick Film", Temperature Coefficient=100ppm/°C, Voltage Rating=75V, Voltage Rating (DC)=50V, Case/Package=0603, Construction=Rectangular, Depth=0.8mm, Features="Moisture Resistant", Height=0.45mm, Lead Free="Lead Free", Lead Pitch=0.3mm, Length=1.6mm, Military Standard=Not, Number of Pins=2, Number of Terminations=2, Packaging="Tape and Reel", Power Rating=100mW, RoHS Compliant=Yes, Series=RC, Size Code=0603, Termination=SMD/SMT, Tolerance=1%, Weight=7.1E-05oz, Width=0.8mm
R6: library part CMP-2000-06958-1, "Chip Resistor, 330 Ohm, +/- 5%, 50 V, -55 to 155 degC, 0603 (1608 Metric), -40 to 155 degC, RoHS, Tape and Reel", Manufacturer=Yageo, Package Description="2-Pin Surface Mount Device, Body 1.6 x 0.8 mm", Package Reference=0603, Power Rating=100mW, Resistance=330, Resistance Tolerance=±5%, Resistor Case Style=0603[1608Metric], Resistor Element Type=ThickFilm, Temperature Coefficient=±100ppm/°C, Voltage Rating=50V, Automotive Qualification Standard=-, Datasheet URL=http://www.yageo.com/documents/recent/PYu-RC_Group_51_RoHS_L_7.pdf, Datasheet Version="Rev. 7, 05/2017", Manufacturer URL=http://www.yageo.com/, Mounting Technology=SurfaceMount, MSL=MSL1-Unlimited, Packaging=CutTape, Product Range=RCSeries, SVHC=ToBeAdvised
R8: library part CMP-26527-003341-1, "56kΩ ±5% 0.25W 1206 Thick Film Chip Resistor AEC-Q200 compliant", Case Code (Imperial)=1206, Case Code (Metric)=3216, Max Operating Temperature=155°C, Max Power Dissipation=250mW, Min Operating Temperature=-55°C, Resistance=56k, Resistor Type="Thick Film", Temperature Coefficient=200ppm/°C, Tolerance=5%, Case/Package=1206, Construction=Rectangular, Contact Plating=Tin, Depth=1.6mm, Features="Automotive AEC-Q200", Height=0.028inch, Lead Free="Lead Free", Length=0.126inch, Military Standard=Not, Mount="Surface Mount", Number of Terminations=2, Packaging="Tape and Reel", Power Rating=250mW, Radiation Hardening=No, RoHS Compliant=Yes, Series=RMCF, Size Code=1206, Width=0.063inch
R10: library part CMP-009-00177-1, "Fixed Resistor, Metal Glaze/thick Film, 0.1W, 44200ohm, 75V, 1% +/-Tol, 100ppm/Cel, Surface Mount, 0603", Case/Package=0603, Max Operating Temperature=155°C, Min Operating Temperature=-55°C, Power=100mW, Tolerance=1%, Mounting Technology="Surface Mount", Pins=2, RoHS Compliant=Yes
R15: library part CMP-1659-00056-1, "Chip Resistor, 1 MOhm, +/- 1%, 100 mW, -55 to 155 degC, 0603 (1608 Metric), RoHS, Tape and Reel", Capacitance="1 mF", Case\Package=Radial, Max Operating Temperature="85 degC", Min Operating Temperature="-40 degC", Package Quantity=200, Tolerance=20%, Voltage Rating="25 V", ComponentLink1Description="Manufacturer URL", ComponentLink1URL=http://www.yageo.com/, ComponentLink2Description=Datasheet, ComponentLink2URL=http://www.yageo.com/documents/recent/PYu-RC_Group_51_RoHS_L_04.pdf, DatasheetVersion="Rev. 4, 02/2016", Diameter="10 mm", Height="20 mm", Lead Pitch="5 mm", Length="20 mm", Mount="Through Hole", PackageDescription="2-Pin Surface Mount Device, Body 1.6 x 0.8 mm", PackageReference=0603, Packaging=Bulk, Radiation Hardening=No, REACH SVHC="No SVHC", RoHSCompliant=true, Voltage Rating (DC)="25 V", Width="0 inch"
R16: library part CMP-26527-001326-1, "12kΩ ±1% 0.1W 0603 Thick Film Chip Resistor AEC-Q200 compliant", Case Code (Imperial)=0603, Case Code (Metric)=1608, Max Operating Temperature=155°C, Max Power Dissipation=100mW, Min Operating Temperature=-55°C, Resistance=12k, Resistor Type="Thick Film", Temperature Coefficient=100ppm/°C, Tolerance=1%, Case/Package=0603, Contact Plating=Tin, Features="Automotive AEC-Q200", Height=0.022inch, Lead Free="Lead Free", Length=0.061inch, Mount="Surface Mount", Number of Terminations=2, Packaging="Tape and Reel", Power Rating=100mW, Radiation Hardening=No, RoHS Compliant=Yes, Series=RMCF, Size Code=0603, Width=0.031inch
SD1: library part CMP-2000-05245-1, "MicroSD Card Connector, Hinge Type, -40 to 85 degC, 8-Pin SMD, RoHS, Tape and Reel", Current Rating=500mA, Manufacturer=Molex, Voltage Rating=100VDC, Brand=Molex, Card Type=microSD, Contact Material=CopperAlloy, Datasheet URL=http://www.molex.com/pdm_docs/sd/472192001_sd.pdf, Datasheet Version="Rev. F, 06/2009", Factory Pack Quantity=2400, Housing Material=Thermoplastic, Insertion - Extraction Style=Hinged, Manufacturer URL=http://www.molex.com/, Mounting Style=SMD/SMT, Number of Contacts=8, Packaging=Reel, Pitch=1.09mm, Product=CardConnectors, Product Category=MemoryCardConnectors, RoHS=Details, Series=47219, Termination Style=SMD
TP1 TP2 TP3 TP4 TP5 TP6 TP7: library part CMP-00030-00001-2, "PC Test Point"
U1 U4: library part CMP-019-00049-2, "IC Reg Lin Pos Adj 500MA SOT23-5"
U2: library part CMP-1685-00007-2, "IC OSC SGL TIMER 100KHZ 8-SOIC", Case/Package=SOIC, Frequency=100kHz, High Level Output Current=-200mA, Low Level Output Current=200mA, Max Operating Temperature=70°C, Max Supply Voltage=16V, Min Operating Temperature=0°C, Min Supply Voltage=4.5V, Operating Supply Current=10mA, Package Quantity=2500, Quiescent Current=15mA, Contact Plating=Gold, Height=1.58mm, Lead Free="Lead Free", Length=4.9mm, Mount="Surface Mount", Number of Pins=8, Number of Timers/Counters=1, Packaging="Tape and Reel", Radiation Hardening=No, REACH SVHC="No SVHC", Weight=0.002561oz, Width=3.91mm
U3: library part CMP-2000-07131-1, "Single Schmitt-Trigger Inverter Gate, 10.6 ns max, 2 to 5.5 V, -40 to 125 degC, 5-Pin SOT23 (DBV), Green (RoHS & no Sb/Br), Tape and Reel", Logic Case Style=SOT-23, Manufacturer="Texas Instruments", Operating Temperature Max=85°C, Operating Temperature Min=-40°C, Operating Temperature Range=-40°Cto+85°C, Output Current=8mA, Package Description="5-Pin Small Outline Transistor, Body 2.9 x 1.6 mm, Pitch 0.95 mm", Package Reference=DBV0005A, Supply Voltage=5.5V, Supply Voltage Min=2V, Supply Voltage Range=2Vto5.5V, Base Number=74, Datasheet URL=http://www.ti.com/lit/ds/symlink/sn74ahc1g14.pdf, Datasheet Version="Rev. Q, 09/2015", IC Generic Number=74AHC1G14, Logic Function Number=741G14, Logic IC Base Number=74114, Logic IC Family=AHC, Logic IC Function=SingleInverterwithSchmittTrigger, Logic Type=Inverter, Manufacturer URL=http://www.ti.com/, Mounting Technology=SurfaceMount, No. of Gates=1, No. of Inputs=1, No. of Pins=5, Output Current Max=8mA, Package / Case=SOT-23, Package URL=http://www.ti.com/lit/ml/mpds018l/mpds018l.pdf, Supply Voltage Max=5.5V, SVHC=NoSVHC(19-Dec-2012), Termination Type=SMD
U5: library part CMP-0859-00500-4, "IC CONFIG MULT-FUNC GATE SC70-6", Ambient Temperature Range High=+125°C, Ambient Temperature Range Low=-40°C, Manufacturer="Texas Instruments", Max Supply Voltage=5.5V, Min Supply Voltage=1.5V, Nominal Supply Current=10uA, Package=DCK0006A, Temperature="-40°C to +125°C", Automotive=No, Category=IC, ComponentLink2Description=Datasheet, ComponentLink2URL=http://www.ti.com/lit/ds/symlink/sn74lvc1g97.pdf, Device Class L1="Integrated Circuits (ICs)", Device Class L2="Logic ICs", Device Class L3="Logic Gates", Digikey Description="IC CONFIG MULT-FUNC GATE SC70-6", Height=1.1mm, Lead Free=Yes, Manufacturer Part Number=SN74LVC1G97DCKR, Mouser Description="Logic Gates CONFIGURABLE MULTI FUNCTN GATE", Number of Circuits=1, Number Of Inputs=3, Number Of Outputs=1, Octopart=https://octopart.com/sn74lvc1g97dckr-texas+instruments-464843, Propagation Delay=6.1ps, RoHS=TRUE, Standoff Height=0mm, Temperature Range High=+125°C, Temperature Range Low=-40°C
U6: library part CMP-06284-000093-1, "IC INTERFACE SPECIALIZED 36QFN", Capacitor Type=Ceramic, Case/Package=QFN, Manufacturer=Murata, Manufacturer Part Number=GRM188R71H104KA93D, Max Operating Temperature=70°C, Max Supply Voltage=3.6V, Min Operating Temperature=0°C, Min Supply Voltage=3V, Operating Supply Current=135mA, Operating Supply Voltage=3.3V, Package Quantity=490, Package Shape=Rectangular, Package Style=SMTMeter, Rated DC Voltage (URdc)=50V, Temperature Characteristics Code=X7R, Tolerance  (fill in as +-)=10%, Category="Ceramic Capacitors", ComponentLink1Description=https://datasheet.ciiva.com:443/pdfs/VipMasterIC/IC/MURE/MURE-S-A0004386736/MURE-S-A0004388063-1.pdf?src-supplier=IHS+Markit, ComponentLink1URL=https://datasheet.ciiva.com:443/pdfs/VipMasterIC/IC/MURE/MURE-S-A0004386736/MURE-S-A0004388063-1.pdf?src-supplier=IHS+Markit, ComponentLink2Description=https://datasheet.ciiva.com/11786/0900766b807a1cab-11786047.pdf?src-supplier=Rs, ComponentLink2URL=https://datasheet.ciiva.com/11786/0900766b807a1cab-11786047.pdf?src-supplier=Rs, ComponentLink3Description=https://datasheet.ciiva.com/19467/1857604-19467681.pdf?src-supplier=Jameco, ComponentLink3URL=https://datasheet.ciiva.com/19467/1857604-19467681.pdf?src-supplier=Jameco, ComponentLink4Description=https://datasheet.ciiva.com/29201/451744-da-01-en-vs-kondensator-0603-29201904.pdf?src-supplier=Conrad, ComponentLink4URL=https://datasheet.ciiva.com/29201/451744-da-01-en-vs-kondensator-0603-29201904.pdf?src-supplier=Conrad, ComponentLink5Description=https://datasheet.ciiva.com/131/partnumbering-e-01-131738.pdf?src-supplier=Digikey, ComponentLink5URL=https://datasheet.ciiva.com/131/partnumbering-e-01-131738.pdf?src-supplier=Digikey, ComponentLink6Description=https://datasheet.ciiva.com/131/partnumbering-e-01-131739.pdf?src-supplier=Digikey, ComponentLink6URL=https://datasheet.ciiva.com/131/partnumbering-e-01-131739.pdf?src-supplier=Digikey, ComponentLink7Description=https://datasheet.ciiva.com/131/partnumbering-e-01-131740.pdf?src-supplier=Digikey, ComponentLink7URL=https://datasheet.ciiva.com/131/partnumbering-e-01-131740.pdf?src-supplier=Digikey, ComponentLink8Description=https://datasheet.ciiva.com/14116/nmgrm-data-en-14116602.pdf?src-supplier=Distrelec, ComponentLink8URL=https://datasheet.ciiva.com/14116/nmgrm-data-en-14116602.pdf?src-supplier=Distrelec, ComponentLink9Description=https://datasheet.ciiva.com/48436/nmgrm-data-en-48436667.pdf?src-supplier=Distrelec, ComponentLink9URL=https://datasheet.ciiva.com/48436/nmgrm-data-en-48436667.pdf?src-supplier=Distrelec, ComponentLink10Description=https://datasheet.ciiva.com/28534/4360-28534245.pdf?src-supplier=Element14, ComponentLink10URL=https://datasheet.ciiva.com/28534/4360-28534245.pdf?src-supplier=Element14, ComponentLink11Description=https://datasheet.ciiva.com/7937/1747470-7937658.pdf?src-supplier=Element14, ComponentLink11URL=https://datasheet.ciiva.com/7937/1747470-7937658.pdf?src-supplier=Element14, ComponentLink12Description=https://datasheet.ciiva.com/7937/4360-7937659.pdf?src-supplier=Element14, ComponentLink12URL=https://datasheet.ciiva.com/7937/4360-7937659.pdf?src-supplier=Element14, ComponentLink13Description=https://datasheet.ciiva.com:443/pdfs/VipMasterIC/IC/KEME/KEME-S-A0008991665/KEME-S-A0008991665-1.pdf?src-supplier=IHS+Markit, ComponentLink13URL=https://datasheet.ciiva.com:443/pdfs/VipMasterIC/IC/KEME/KEME-S-A0008991665/KEME-S-A0008991665-1.pdf?src-supplier=IHS+Markit, Data Rate=35Mbps, Dielectric Material=Ceramic, Height=0.95mm, Interface=SPI, JESD-609 Code=e3, Lead Free="Lead Free", Length=6.15mm, Mount="Surface Mount", Mounting Technology="Surface Mount", Multilayer=Yes, Number of Pins=36, Number of Transceivers=1, Packaging=Tray, Pins=2, Pricing="8000=0.0106, 12000=0.0105, 20000=0.0104, 24000=0.0103, 100000=0.0096 (USD)", Reach SVHC Compliant=Yes, RoHS=Yes, RoHS Compliant=Yes, Series=-, Stock=200000, Supplier="Arrow Electronics", Supplier Part Number=GRM188R71H104KA93D, Terminal Finish=Nickel, Termination=Wraparound, Tolerance (fill in as +-)=10%, Width=6.15mm
Y1: library part CMP-03913-116876455-1, "830035266 WE-XTAL Quartz Crystal", Frequency=24MHz, Max Operating Temperature=60°C, Min Operating Temperature=-10°C, Height=800µm, Length=3.2mm, NexarPartId=116876455, Width=2.5mm

## Free pads (board coordinates)
  round 0 hole 0.7: 17(-20.8,-11.5)
  round 0 hole 0.8: ""(-20.75,-11.5) ""(-19.75,-11.5) ""(-18.75,-11.5) ""(-17.75,-11.5) ""(-16.75,-11.5) ""(-15.75,-11.5) ""(9.75,-11.5) ""(10.75,-11.5) ""(11.75,-11.5) ""(12.75,-11.5) ""(13.75,-11.5) ""(14.75,-11.5)

## Via types
v1: diameter 0.45, hole 0.3, Top Layer to Bottom Layer, 82 vias
v2: diameter 0.5, hole 0.3, Top Layer to Bottom Layer, 25 vias
v3: diameter 2, hole 1.5, Top Layer to Bottom Layer, 12 vias

## Nets (pads, with @x,y where several pads share a name; then routed paths per layer and width w, separated by ;. In a path a pad name is that pad's centre, name@x,y a point inside that pad or via, vN(x,y) a via of type N, cw(c..) or ccw(c..) an arc to the next point about the centre after c; other vN are vias at no path point)
3V3: C2.1 C3.1 C14.1 C18.1 C19.1 C20.1 FB2.1 Q1.3 Q2.3 R4.1 TP2.1 U1.5 U3.2 U3.5 U6.6 U6.14 U6.18 U6.22 | length 33.2
  Top Layer w0.254: v1(-12.6,-22) -13.172,-21.428 C3.1 -13.931,-21.428 -14.081,-21.278 C2.1 -15.908,-21.278 -16.181,-21.551 U1.5 -15.031,-23.078 -12.581,-25.528 R4.1 -12.431,-25.428 TP2.1 ; v1(-0.4,-0.2) -0.1,0.1 C20.1 0.481,0.6 0.976,1.095 1.583,1.095 U6.14 ; v1(0.8,-1.5) 0.838,-1.462 0.838,-1.34 1.278,-0.9 U6.18 ; v1(1.4,-16.5) 1.438,-16.538 1.696,-16.538 2.119,-16.961 Q1.3 ; v1(1.844,4.756) 1.844,4.809 1.7,4.953 C19.1 2.342,5.8 3.895,4.246 3.895,3.917 U6.6 ; v1(3.2,-3.7) 3.253,-3.7 3.38,-3.573 3.827,-3.573 C18.1 U6.22 ; v1(13.4,6.6) 13.347,6.6 13.199,6.748 12.928,6.748 FB2.1 12.826,7.35 C14.1 ; v1(13.8,-17.8) 13.8,-17.853 14.135,-18.188 Q2.3 ; U3.2 20.619,-22.328 20.5,-22.447 v1(20.5,-22.5) 20.538,-22.538 20.538,-22.646 21.569,-23.678 U3.5
  other v3: -3.081,-15.028 -3.081,-7.972
3V3_EN: TP3.1 U1.3 | length 3.1
  Top Layer w0.254: U1.3 -18.554,-24.978 -18.381,-25.151 TP3.1
4.5V: C8.1 C9.1 R7.1 R10.2 R11.2 TP4.1 U2.4 U2.8 U4.5 U5.1 U5.5 | length 64.9
  Top Layer w0.254: v1(-11.6,-20.6) -11.562,-20.562 -11.562,-19.269 -10.622,-18.328 TP4.1 -6.706,-18.328 -5.906,-19.128 R10.2 -5.758,-19.005 R11.2 ; U4.5 -3.227,-20.878 -3.4,-20.705 -3.4,-20.298 ; C8.1 -0.931,-17.778 -2.006,-18.853 -2.006,-18.904 -3.4,-20.298 ; C9.1 -0.931,-16.428 -3.102,-18.599 -3.102,-18.802 -3.304,-19.005 R11.2 ; v1(4.1,-30.3) 4.138,-30.262 5.561,-30.262 R7.1 6.79,-30.205 7.018,-30.433 U2.8 10.129,-30.433 11.619,-28.943 11.619,-28.113 13.109,-26.623 U2.4 14.033,-25.967 v1(14.5,-25.5) ; v1(16.9,-25.1) 16.9,-25.08 17.119,-24.861 U5.5 17.192,-24.055 17.192,-23.336 17.769,-22.759 U5.1 ; -3.4,-20.298 -3.4,-19.024 R11.2
  Layer 2 w0.254: v1(-11.6,-20.6) -11.6,-20.653 -11.7,-20.753 -11.7,-27.2 -8.6,-30.3 v1(4.1,-30.3) ; TP4.1@-11.593,-19.269 -10.652,-18.328 TP4.1 ; v1(14.5,-25.5) 16.447,-25.5 16.847,-25.1 v1(16.9,-25.1)
4.5V_EN: C11.1 Q3.2 R1.1 TP7.1 U4.3 | length 22.2
  Top Layer w0.254: U4.3 -5.381,-22.778 -4.403,-21.8 -2.6,-21.8 -1.828,-21.028 R1.1 -0.681,-21.028 0.062,-20.285 0.062,-20.038 v1(0.1,-20) ; v1(5.1,-18.8) 5.153,-18.8 5.381,-19.028 TP7.1 9.119,-19.699 10.438,-21.018 10.648,-21.018 11.027,-21.397 11.027,-22.036 12.661,-22.036 Q3.2
  Layer 2 w0.254: v1(0.1,-20) 1.3,-18.8 v1(5.1,-18.8)
AVCC: C15.1 C16.1 FB2.2 U6.36 | length 7
  Top Layer w0.254: U6.36 7.523,3.1 7.9,3.478 C16.1 7.95,5.7 8.1,5.85 C15.1 9.673,6.123 10.173,6.123 11.15,7.1 FB2.2
CC: J2.A5 R8.1 | length 6.1
  Top Layer w0.254: R8.1 15,-2.749 16.976,-0.773 17.647,-0.773 J2.A5
CD: R14.1 U6.26 | length 2.3
  Top Layer w0.254: R14.1 5.723,-2.978 5.9,-2.801 U6.26
CLK: SD1.5 U6.9 | length 13.3
  Top Layer w0.254: SD1.5 -8.132,3.077 -8.132,2.349 -7.983,2.2 -4.2,2.2 -1.4,5 -0.155,5 0.933,3.912 U6.9
CMD: SD1.3 U6.11 | length 13.9
  Top Layer w0.254: SD1.3 -10.387,3.132 -10.387,2.387 -9.6,1.6 -4.1,1.6 -2.973,2.727 1.143,2.727 1.27,2.6 U6.11
D_IN_N: D3.4 J1.3 J2.A7 | length 55
  Top Layer w0.155: J1.3 -22.077,0.178 -19.322,0.178 -10.745,8.755 3.619,8.755 4.565,7.809 4.565,7.667 ; D3.4 4.565,6.77 4.565,7.667 ; J2.A7 17.624,0.296 16.847,0.296 16.197,0.945 16.197,3.608 16.893,4.303 16.893,7.407 15.242,9.058 5.955,9.058 4.604,7.706 4.565,7.667
D_IN_P: D3.6 J1.2 J2.A6 | length 58.3
  Top Layer w0.155: J1.2 -22.077,-0.178 -19.175,-0.178 -10.578,8.42 2.011,8.42 ; v1(4,7.6) 3.18,8.42 2.011,8.42 ; D3.6 4.423,5.773 3.928,5.773 2.905,6.796 2.905,7.526 2.011,8.42 ; v1(5.068,7.4) 5,7.4 4.9,7.5 6.102,8.702 15.095,8.702 16.538,7.26 16.538,4.45 15.842,3.755 15.842,0.798 16.89,-0.25 J2.A6
  Bottom Layer w0.155: v1@4.019,7.6 4.219,7.4 v1(5.068,7.4)
  Bottom Layer w0.381: v1(4,7.6) v1@4.019,7.6
D_N: D3.3 U6.3 | length 3.3
  Top Layer w0.155: U6.3 5.4,6.4 5.627,6.628 6.032,6.628 D3.3
D_P: D3.1 U6.2 | length 1.9
  Top Layer w0.155: U6.2 5.9,4.256 6.105,4.461 D3.1
DAT0: SD1.7 U6.5 | length 15.1
  Top Layer w0.254: SD1.7 -5.932,3.623 -5.932,4.449 -5.121,5.26 -4.64,5.26 -4.437,5.463 -4.048,5.852 -4.048,6.752 -3.5,7.3 1.8,7.3 2.2,6.9 2.2,6.499 4.053,4.646 4.395,4.305 4.395,3.917 U6.5
DAT1: SD1.8 U6.4 | length 16.5
  Top Layer w0.254: SD1.8 -5,3.455 v1(-5,4.6) ; v1(-4.6,6.3) -4.6,7.3 -4,7.9 2.1,7.9 2.6,7.4 2.6,6.6 4.2,5 4.6,5 4.9,4.7 U6.4
  Bottom Layer w0.254: v1(-5,4.6) -5,4.653 -4.6,5.053 v1(-4.6,6.3)
DAT2: SD1.1 U6.25 | length 25.8
  Top Layer w0.254: SD1.1 -12.805,3 -12.352,2.547 -12.352,2.526 -3.726,-6.1 3.8,-6.1 5,-4.9 5,-3.2 5.4,-2.8 U6.25
DAT3: SD1.2 U6.23 | length 23.1
  Top Layer w0.254: SD1.2 -11.432,3.077 -11.432,2.706 -3.426,-5.3 3.671,-5.3 4.4,-4.571 U6.23
FLTOUT: Q2.1 U2.3 U5.3 | length 9.6
  Top Layer w0.254: U2.3 14.956,-27.893 15.711,-27.138 15.711,-22.936 16.469,-22.178 U5.3 16.469,-21.678 16.104,-21.312 Q2.1
GND: C1.1 C2.2 C3.2 C4.2 C5.2 C6.2 C7.2 C8.2 C9.2 C10.2 C11.2 C12.2 C13.1 C14.2 C15.2 C16.2 C17.1 C18.2 C19.2 C20.2 C21.2 C22.2 C23.2 D1.1 D2.1 D3.2 J1.4 J2.A1 J2.A12 R2.1 R5.1 R6.1 R8.2 R9.2 R11.1 R12.2 R13.2 R14.2 R16.1 SD1.4 U1.2 U2.1 U3.3 U4.2 U5.2 U6.28 U6.37 Y1.2 Y1.4 | length 58.1
  Top Layer w0.254: v1(-23.1,-23.1) -23.062,-23.062 -22.665,-23.062 -22.454,-22.851 -22.404,-22.851 -22.131,-22.578 C4.2 ; J1.4 -21.906,-4.494 -21.306,-4.494 v1(-21.3,-4.5) ; C23.2 -20.808,-24.379 -20.679,-24.379 v1(-20.3,-24) ; v1(-19.8,-9.6) -19.762,-9.562 -19.762,-9.312 -19.35,-8.9 C5.2 ; v1(-19.5,-24.4) -19.447,-24.4 -19.248,-24.201 -18.754,-24.201 U1.2 ; v1(-18.3,-9.8) -18.262,-9.762 -18.262,-9.512 -17.9,-9.15 R6.1 ; v1(-16.7,-19) -16.7,-19.009 -15.931,-19.778 C2.2 ; R5.1 -15.804,-28.205 -15.338,-28.671 -15.338,-29.062 v1(-15.3,-29.1) ; v1(-14.3,-20) -14.262,-20.038 -14.262,-20.297 -13.931,-20.628 C3.2 ; v1(-10.1,-21.4) -10.047,-21.4 -9.798,-21.151 -9.404,-21.151 -9.131,-20.878 C10.2 ; v1(-9.9,4.8) -9.505,4.405 SD1.4 ; v1(-6.7,-22.2) -6.328,-21.828 U4.2 ; v1(-4.1,-17.1) -4.062,-17.138 -3.971,-17.138 -3.458,-17.651 R11.1 ; v1(-1.5,-20) -1.462,-19.962 -1.462,-19.81 -0.931,-19.278 C8.2 ; v1(-1.5,0.6) C20.2 ; v1(-1.1,4.3) -1.062,4.262 -1.062,4.013 -0.65,3.6 C13.1 ; C9.2 -0.808,-15.555 -0.655,-15.555 v1(-0.3,-15.2) ; v1(-0.571,-2.248) -0.571,-3.429 C12.2 ; v1(0.4,6.4) 0.4,6.35 0.9,5.85 C19.2 ; v1(2.1,-20.1) 2.1,-20.153 2.271,-20.324 2.271,-20.705 R2.1 ; v1(3.2,-4.7) 3.238,-4.662 3.488,-4.662 3.85,-4.3 C18.2 ; v1(4.6,-23.6) 4.638,-23.638 4.829,-23.638 5.894,-24.703 C1.1 ; C6.2 4.892,-26.855 4.892,-26.261 5.1,-26.053 v1(5.1,-26) ; D3.2 v1(6.9,6.2) ; v1(6.2,-5) 6.238,-4.962 6.238,-4.816 7.077,-3.977 R14.2 ; U6.28 7.213,-1.613 v1(7.7,-2.1) ; v1(7.7,7.2) 7.7,7.161 7.9,6.961 C16.2 ; v1(8.2,-23.1) 8.238,-23.138 8.238,-23.296 8.569,-23.628 C7.2 ; v1(8.5,8.2) 9.35,7.35 C15.2 ; v1(9.6,-22.6) 9.638,-22.562 9.735,-22.562 10.219,-22.078 C11.2 ; v1(9.6,-2.1) 9.6,-2.047 9.465,-1.912 9.465,-1.32 C21.2 9.432,-1.222 10.878,-1.222 Y1.2 ; D1.1 11.4,-8.65 v1(11.4,-8.7) 11.453,-8.7 11.68,-8.473 12.077,-8.473 D2.1 ; R13.2 10.077,-3.823 10.662,-3.238 10.662,-2.938 v1(10.7,-2.9) ; R16.1 12.501,4.826 13.137,5.462 13.262,5.462 v1(13.3,5.5) ; C17.1 12.65,3.15 13.162,3.662 13.362,3.662 v1(13.4,3.7) ; Y1.4 12.954,1.454 C22.2 14.4,1.5 14.762,1.862 14.762,2.162 v1(14.8,2.2) ; U2.1 14.956,-30.433 15.852,-29.538 15.962,-29.538 v1(16,-29.5) ; C14.2 14.95,5.85 15.562,5.238 15.562,4.938 v1(15.6,4.9) ; R8.2 15,-7.653 15.1,-7.553 v1(15.1,-7.5) ; v1(16.6,-3.5) 16.638,-3.462 16.638,-3.232 17.12,-2.75 J2.A1 ; v1(16.7,-20.9) 16.7,-20.953 17.046,-21.299 17.046,-21.855 U5.2 ; v1(16.7,3.4) 16.738,3.362 16.738,3.132 17.12,2.75 J2.A12 J2.A12@17.75,2.75 ; R12.2 17.7,-18.77 v1(17.7,-18.3) ; v1(19.3,-22.2) 19.3,-22.147 19.521,-21.926 19.521,-21.401 U3.3 ; v1(20.9,-26.7) 21.296,-26.304 R9.2
  other v2: 2.6,-0.7 3.5,-0.7 4.4,-0.7 5.3,-0.7 6.2,-0.7 2.6,0.2 3.5,0.2 4.4,0.2 5.3,0.2 6.2,0.2 2.6,1.1 3.5,1.1 4.4,1.1 5.3,1.1 6.2,1.1 2.6,2 3.5,2 4.4,2 5.3,2 6.2,2 2.6,2.9 3.5,2.9 4.4,2.9 5.3,2.9 6.2,2.9
  other v3: -10.981,-15.028 -10.981,-7.972
NetC1_2: C1.2 Q1.1 R1.2 R2.2 | length 8.3
  Top Layer w0.254: Q1.1 1.169,-20.828 R1.2 1.019,-21.028 2.091,-22.1 3.047,-22.1 4.044,-21.103 R2.2 5.794,-21.028 C1.2
NetC6_1: C6.1 R7.2 U2.6 U2.7 | length 8.6
  Top Layer w0.254: R7.2 R7.2@5.696,-28.851 ; C6.1 6.519,-28.028 ; U2.7 6.007,-29.163 R7.2@5.696,-28.851 ; U2.6 6.654,-27.893 6.519,-28.028 ; R7.2@5.696,-28.851 6.519,-28.028
NetC7_1: C7.1 TP6.1 U2.5 | length 11.5
  Top Layer w0.254: TP6.1 2.619,-27.159 3.56,-28.1 5.1,-28.1 5.619,-27.581 5.619,-26.682 6.301,-26 7.574,-26 8.197,-26.623 U2.5@8.789,-26.623 ; C7.1 8.619,-26.453 U2.5@8.789,-26.623 ; U2.5 U2.5@8.789,-26.623
NetC13_2: C13.2 U6.13 | length 2.4
  Top Layer w0.254: C13.2 0.247,2.1 0.747,1.6 U6.13
NetC17_2: C17.2 U6.34 | length 4.4
  Top Layer w0.254: U6.34 8.4,2.1 9.4,3.1 C17.2
NetC21_1: C21.1 R15.1 U6.33 Y1.1 | length 9.1
  Top Layer w0.254: U6.33 8.401,1.6 8.751,1.95 R15.1 R15.1@9.5,1.95 ; v1(8.9,-0.2) 8.938,-0.238 9.138,-0.238 9.4,-0.5 C21.1 ; v1(10.1,2.5) 10.05,2.5 R15.1@9.5,1.95 ; Y1.1 10.15,1.2 9.673,1.677 9.673,1.777 R15.1@9.5,1.95
  Bottom Layer w0.254: v1(8.9,-0.2) 8.9,1.3 v1(10.1,2.5)
NetC22_1: C22.1 R15.2 U6.32 Y1.3 | length 8.9
  Top Layer w0.254: U6.32 8.103,1.1 8.553,0.65 R15.2 9.5,0.65 10.05,0.1 11.9,0.1 12.252,-0.252 12.252,-0.427 12.525,-0.7 12.7,-0.7 Y1.3 ; Y1.3@12.788,-0.788 14.171,0.596 14.296,0.596 14.4,0.7 C22.1
NetD1_2: D1.2 Q1.2 | length 6.3
  Top Layer w0.254: Q1.2 3.069,-18.078 v3(5.119,-16.028) ; v3(5,-7) D1.2
NetD2_2: D2.2 R3.2 | length 5.2
  Top Layer w0.254: v3(12.25,-4) 12.25,-5.7 D2.2 ; v3(12.369,-19.028) 12.369,-16.328 R3.2
NetQ2_2: Q2.2 R3.1 | length 2.3
  Top Layer w0.254: R3.1 15.569,-16.353 16.104,-16.888 Q2.2
NetQ3_1: Q3.1 R12.1 U5.4 | length 9.2
  Top Layer w0.254: v1(15.1,-22.8) 15.062,-22.762 15.062,-22.619 14.569,-22.126 Q3.1 14.569,-21.961 15.1,-21.43 15.1,-19.7 15.7,-19.1 16.438,-19.1 17.542,-20.205 R12.1 ; v1(16.4,-23.2) 16.4,-23.253 16.469,-23.322 U5.4
  Layer 2 w0.254: v1(15.1,-22.8) 15.947,-22.8 16.347,-23.2 v1(16.4,-23.2)
NetR4_2: R4.2 R5.2 U1.4 | length 4.2
  Top Layer w0.254: U1.4 -16.181,-26.628 -15.958,-26.851 R5.2 -15.804,-26.851 -14.754,-25.801 -14.504,-25.801 R4.2
NetR10_1: R10.1 U4.4 | length 8
  Top Layer w0.254: R10.1 -5.558,-17.851 -5.102,-17.851 -4.953,-18 v1(-4.9,-18) ; v1(-3.9,-23.4) -3.862,-23.362 -3.862,-23.259 -3.381,-22.778 U4.4
  Layer 2 w0.254: v1(-4.9,-18) -3.9,-19 v1(-3.9,-23.4)
NetR13_1: R13.1 U6.30 | length 4.8
  Top Layer w0.254: U6.30 7.53,0.1 7.663,-0.033 7.675,-0.033 8.723,-1.082 R13.1
NetR16_2: R16.2 U6.35 | length 5
  Top Layer w0.254: U6.35 8.176,2.6 10.376,4.8 R16.2
NetU6_7: U6.7
NetU6_8: U6.8
NetU6_10: U6.10
NetU6_20: U6.20
SHD: C5.1 J1.6 J2.S1 R6.2 SD1.11 | length 89
  Top Layer w0.254: J1.6 -19.85,-6 ; C5.1 -19.25,-8.1 -19,-7.85 R6.2@-17.9,-7.85 ; SD1.11 -16.475,-2.625 -19.85,-6 ; J2.S1 20.027,-4.27 19.519,-4.778 19.519,-5.021 16.5,-8.04 16.5,-9.1 ; -19.85,-6 -19.75,-6 R6.2@-17.9,-7.85 ; R6.2@-17.9,-7.85 R6.2 -17.7,-7.85 -15.85,-9.7 ; -15.85,-9.7 15.9,-9.7 ; -15.85,-9.7 15.9,-9.7 ; 15.9,-9.7 16.5,-9.1 ; 15.9,-9.7 16.5,-9.1
SHORT: R9.1 TP5.1 U2.2 U3.4 U5.6 | length 17.5
  Top Layer w0.254: U2.2 14.956,-29.163 17.769,-26.35 U5.6 ; U3.4 U3.4@19.669,-23.928 ; R9.1 19.783,-25.369 19.783,-24.741 19.669,-24.627 U3.4@19.669,-23.928 ; TP5.1 20.108,-19.028 18.5,-20.636 18.5,-23.147 17.769,-23.878 U5.6 ; U5.6 19.469,-24.128 U3.4@19.669,-23.928
VCC: C4.1 C10.1 D3.5 FB1.1 Q3.3 TP1.1 U1.1 U4.1 | length 85.7
  Top Layer w0.254: FB1.1 -22.8,-24.75 -20.904,-22.854 -20.904,-22.751 -19.638,-21.485 -19.638,-21.138 v1(-19.6,-21.1) ; C4.1 -19.331,-22.528 -18.781,-23.078 U1.1 ; v1(-8.2,-21.9) -8.2,-21.847 -7.904,-21.551 -7.904,-21.101 C10.1 ; v1(-6.6,-21.1) -6.583,-21.1 -6.361,-20.878 U4.1 ; TP1.1 -3.375,-25.428 -1.6,-23.653 v1(-1.6,-23.6) ; v1(3.407,7.1) 3.407,7.047 3.773,6.681 3.773,6.456 3.906,6.323 4.027,6.323 4.15,6.2 D3.5 ; v1(12.4,-24.2) 12.453,-24.2 12.641,-24.012 Q3.3
  Layer 2 w0.254: v1(-19.6,-21.1) -15.2,-16.7 -10.776,-16.7 -9.104,-15.028 v3(-6.881,-15.028) ; v1(-8.2,-21.9) -7.4,-21.1 v1(-6.6,-21.1) -6.638,-21.062 -6.638,-15.271 v3(-6.881,-15.028) ; v1(-1.6,-23.6) -1.6,-20.681 ; v1(12.4,-24.2) 1.919,-24.2 -1.6,-20.681 ; v3(-6.881,-15.028) -5.391,-15.028 -2.754,-17.665 -2.754,-19.526 -1.6,-20.681
  Bottom Layer w0.254: v3(-6.881,-7.972) -6.881,-3.188 v1(3.407,7.1)
VCC_SD: C12.1 SD1.6 U6.21 | length 17.9
  Top Layer w0.254: SD1.6 -7.032,3.623 -7.032,4.615 -6.9,4.747 v1(-6.9,4.8) ; v1(1.1,-2.8) 1.1,-2.853 1.151,-2.904 1.151,-3.3 C12.1 1.752,-3.849 2.352,-3.249 2.403,-3.249 3.4,-2.252 U6.21
  Layer 2 w0.254: v1(-6.9,4.8) -6.9,3.3 -0.8,-2.8 v1(1.1,-2.8)
VIN: C23.1 FB1.2 J1.1 J2.A4 J2.A9 | length 81.2
  Top Layer w0.254: v1(-24.3,-26.1) -24.247,-26.1 -24.171,-26.176 FB1.2 -21.855,-26.176 -20.931,-25.252 C23.1 ; J2.A4 17.693,-1.227 19.073,-1.227 19.75,-0.55 ; J2.A9 17.693,1.227 19.173,1.227 19.75,0.65 19.75,-0.55 ; v1(19.2,-2.4) 19.75,-1.85 19.75,-0.55
  Layer 2 w0.254: v1(-24.3,-26.1) -24.3,-21.4 -17.928,-15.028 v3(-14.581,-15.028) ; J1.1 -14.581,-4.819 v3(-14.581,-7.972) -12.954,-9.6 12,-9.6 v1(19.2,-2.4)
pads on no net: J1.5 J2.A2 J2.A3 J2.A8 J2.A10 J2.A11 J2.S2 SD1.9 SD1.10 SD1.12 U3.1 U6.1 U6.12 U6.15 U6.16 U6.17 U6.19 U6.24 U6.27 U6.29 U6.31
copper on no net: | length 8.6
  Top Layer w0.254: 14.3,-3 14.3,-2.8 14.3,-2.3 v1(15,-1.6) ; 17.67,0.75 17.693,0.727 18.714,0.727 18.862,0.578 18.862,0.038 v1(18.9,0)
  Bottom Layer w0.254: v1(15,-1.6) 18.1,-1.6 18.9,-0.8 v1(18.9,0)

## Polygon pours and split planes (outlines as drawn)
GND on Layer 1 "NONET_L-01_P-001" (solid, pour order 1): -23.982,9.489 ccw(c-23.982,5.489) -27.982,5.489 -27.982,-6.511 ccw(c-23.982,-6.511) -23.982,-10.511 17.018,-10.511 cw(c21.018,-10.511) 21.018,-6.511 ccw(c21.018,-4.011) 23.518,-4.011 23.518,2.989 ccw(c21.018,2.989) 21.018,5.489 cw(c21.018,9.489) 17.018,9.489
GND on Layer 1 "NONET_L-01_P-001" (solid, pour order 4): -23.982,-32.489 cw(c-23.982,-28.489) -27.982,-28.489 -27.982,-16.489 cw(c-23.982,-16.489) -23.982,-12.489 17.018,-12.489 ccw(c21.018,-12.489) 21.018,-16.489 cw(c21.018,-18.989) 23.518,-18.989 23.518,-25.989 cw(c21.018,-25.989) 21.018,-28.489 ccw(c21.018,-32.489) 17.018,-32.489